# Altium PCB PCM.PcbDoc
Units mm, origin at the board's own origin, x right, y up, seen from the top; angles counter-clockwise.
Board outline 50 x 50 mm, 4 copper layers (Top Layer, GND, PWR, Bottom Layer), stack 0.778 mm thick; 169 components, 94 nets, 556 pads, 187 vias.
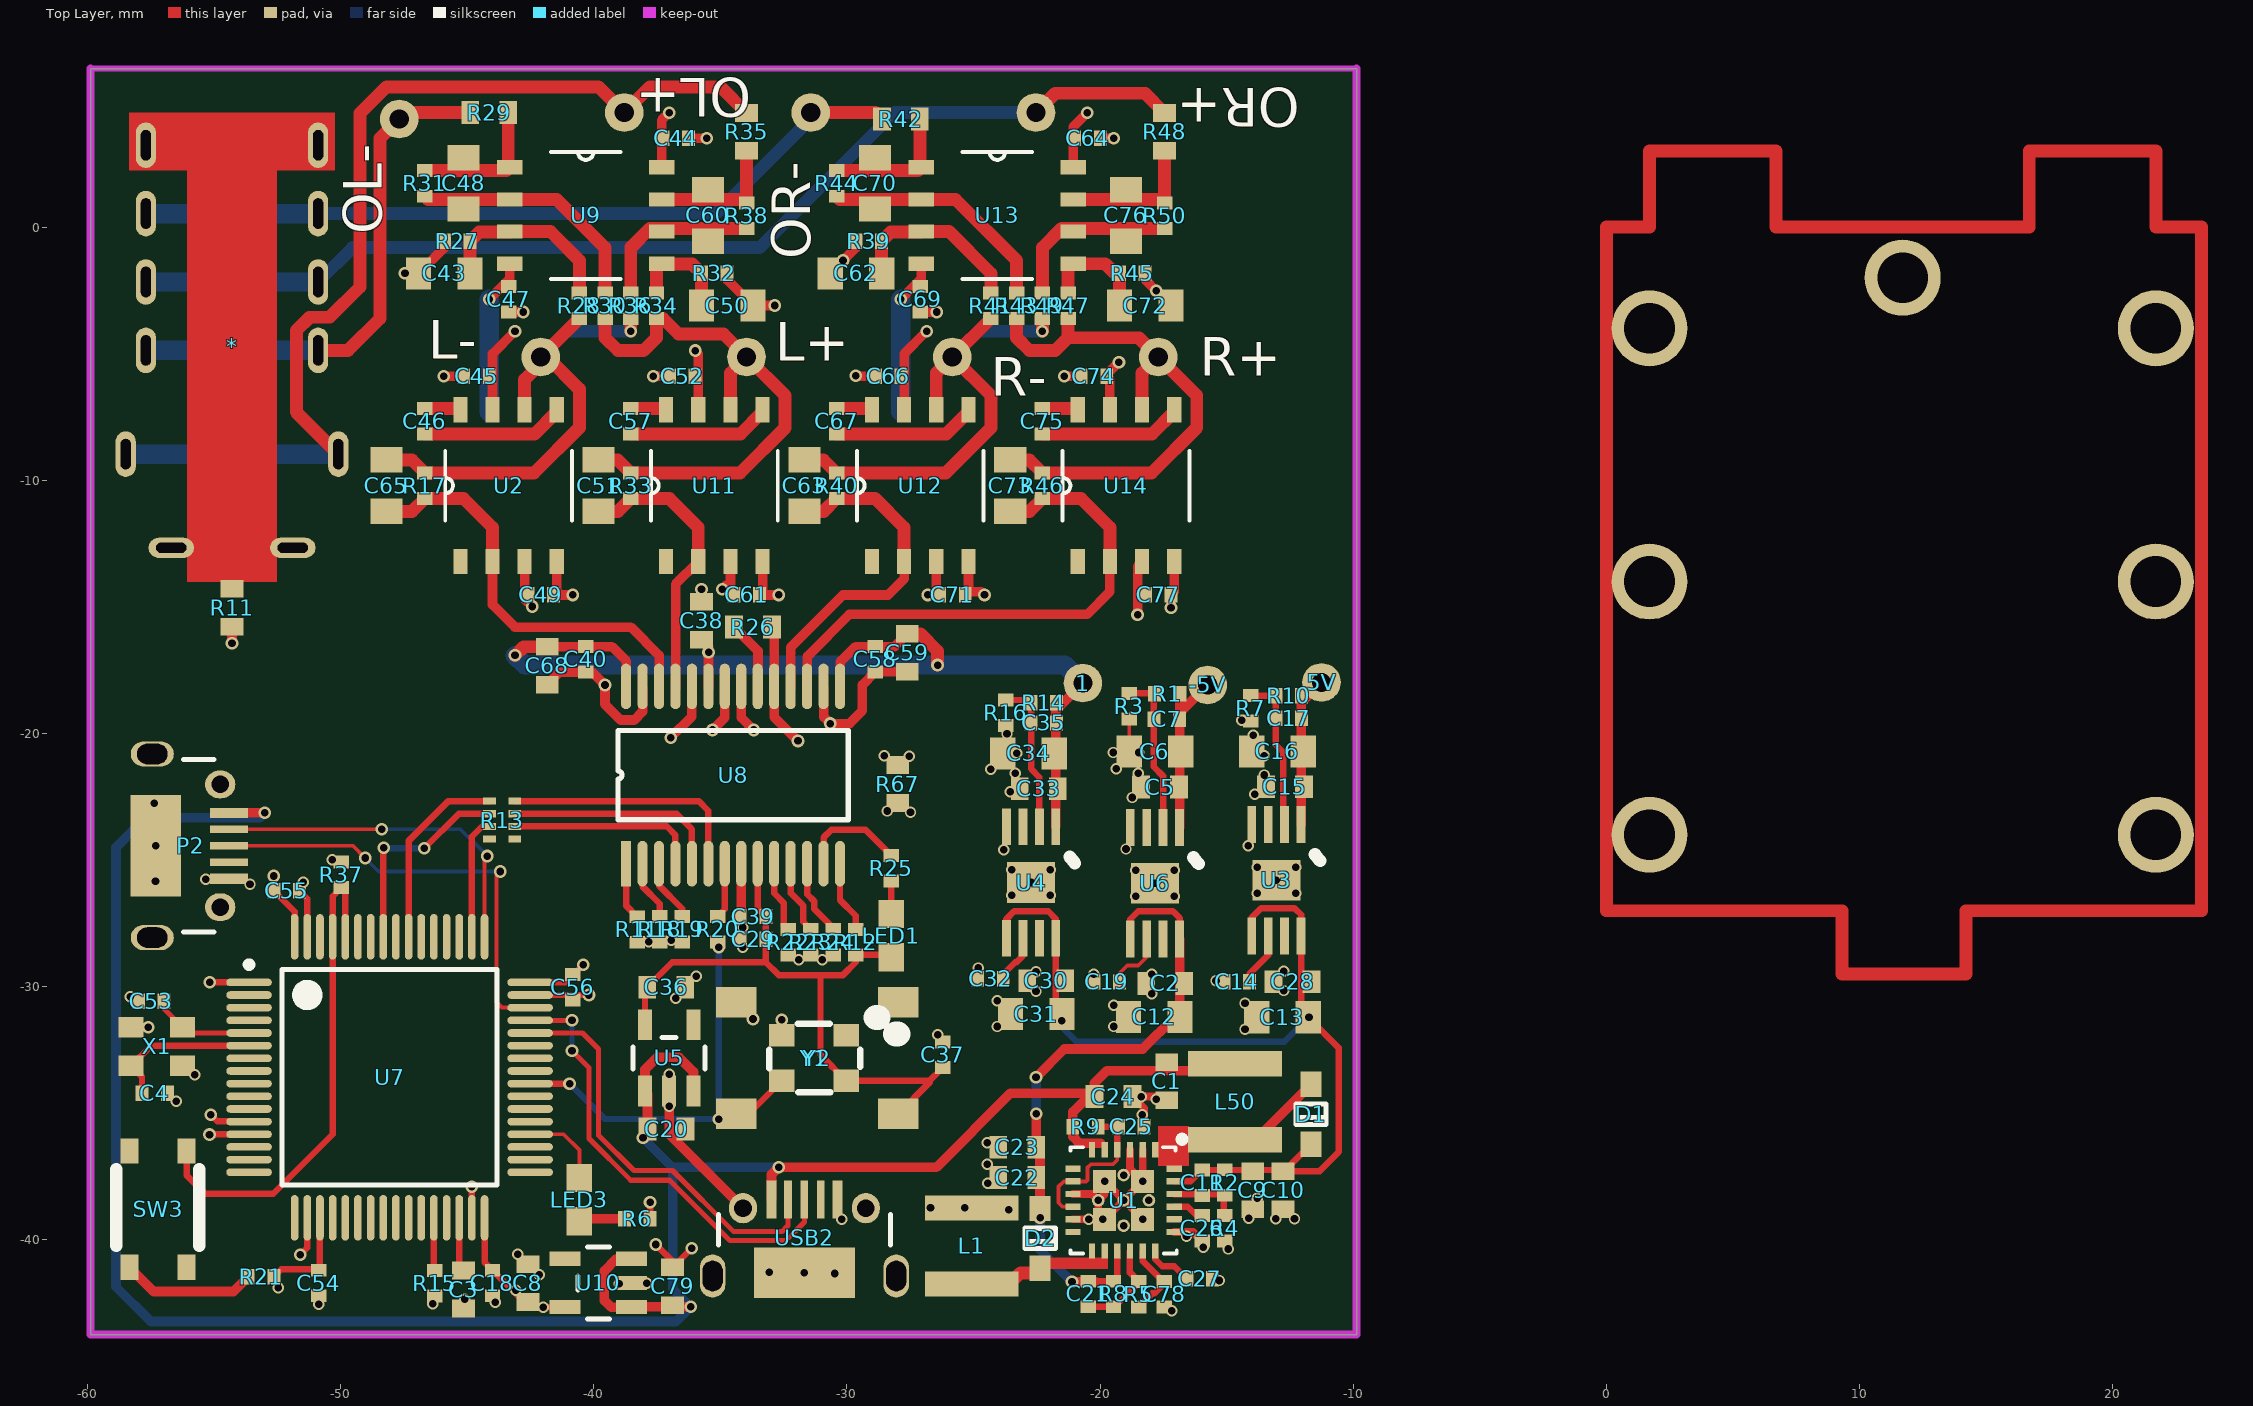
[diagram p0: Top Layer view]
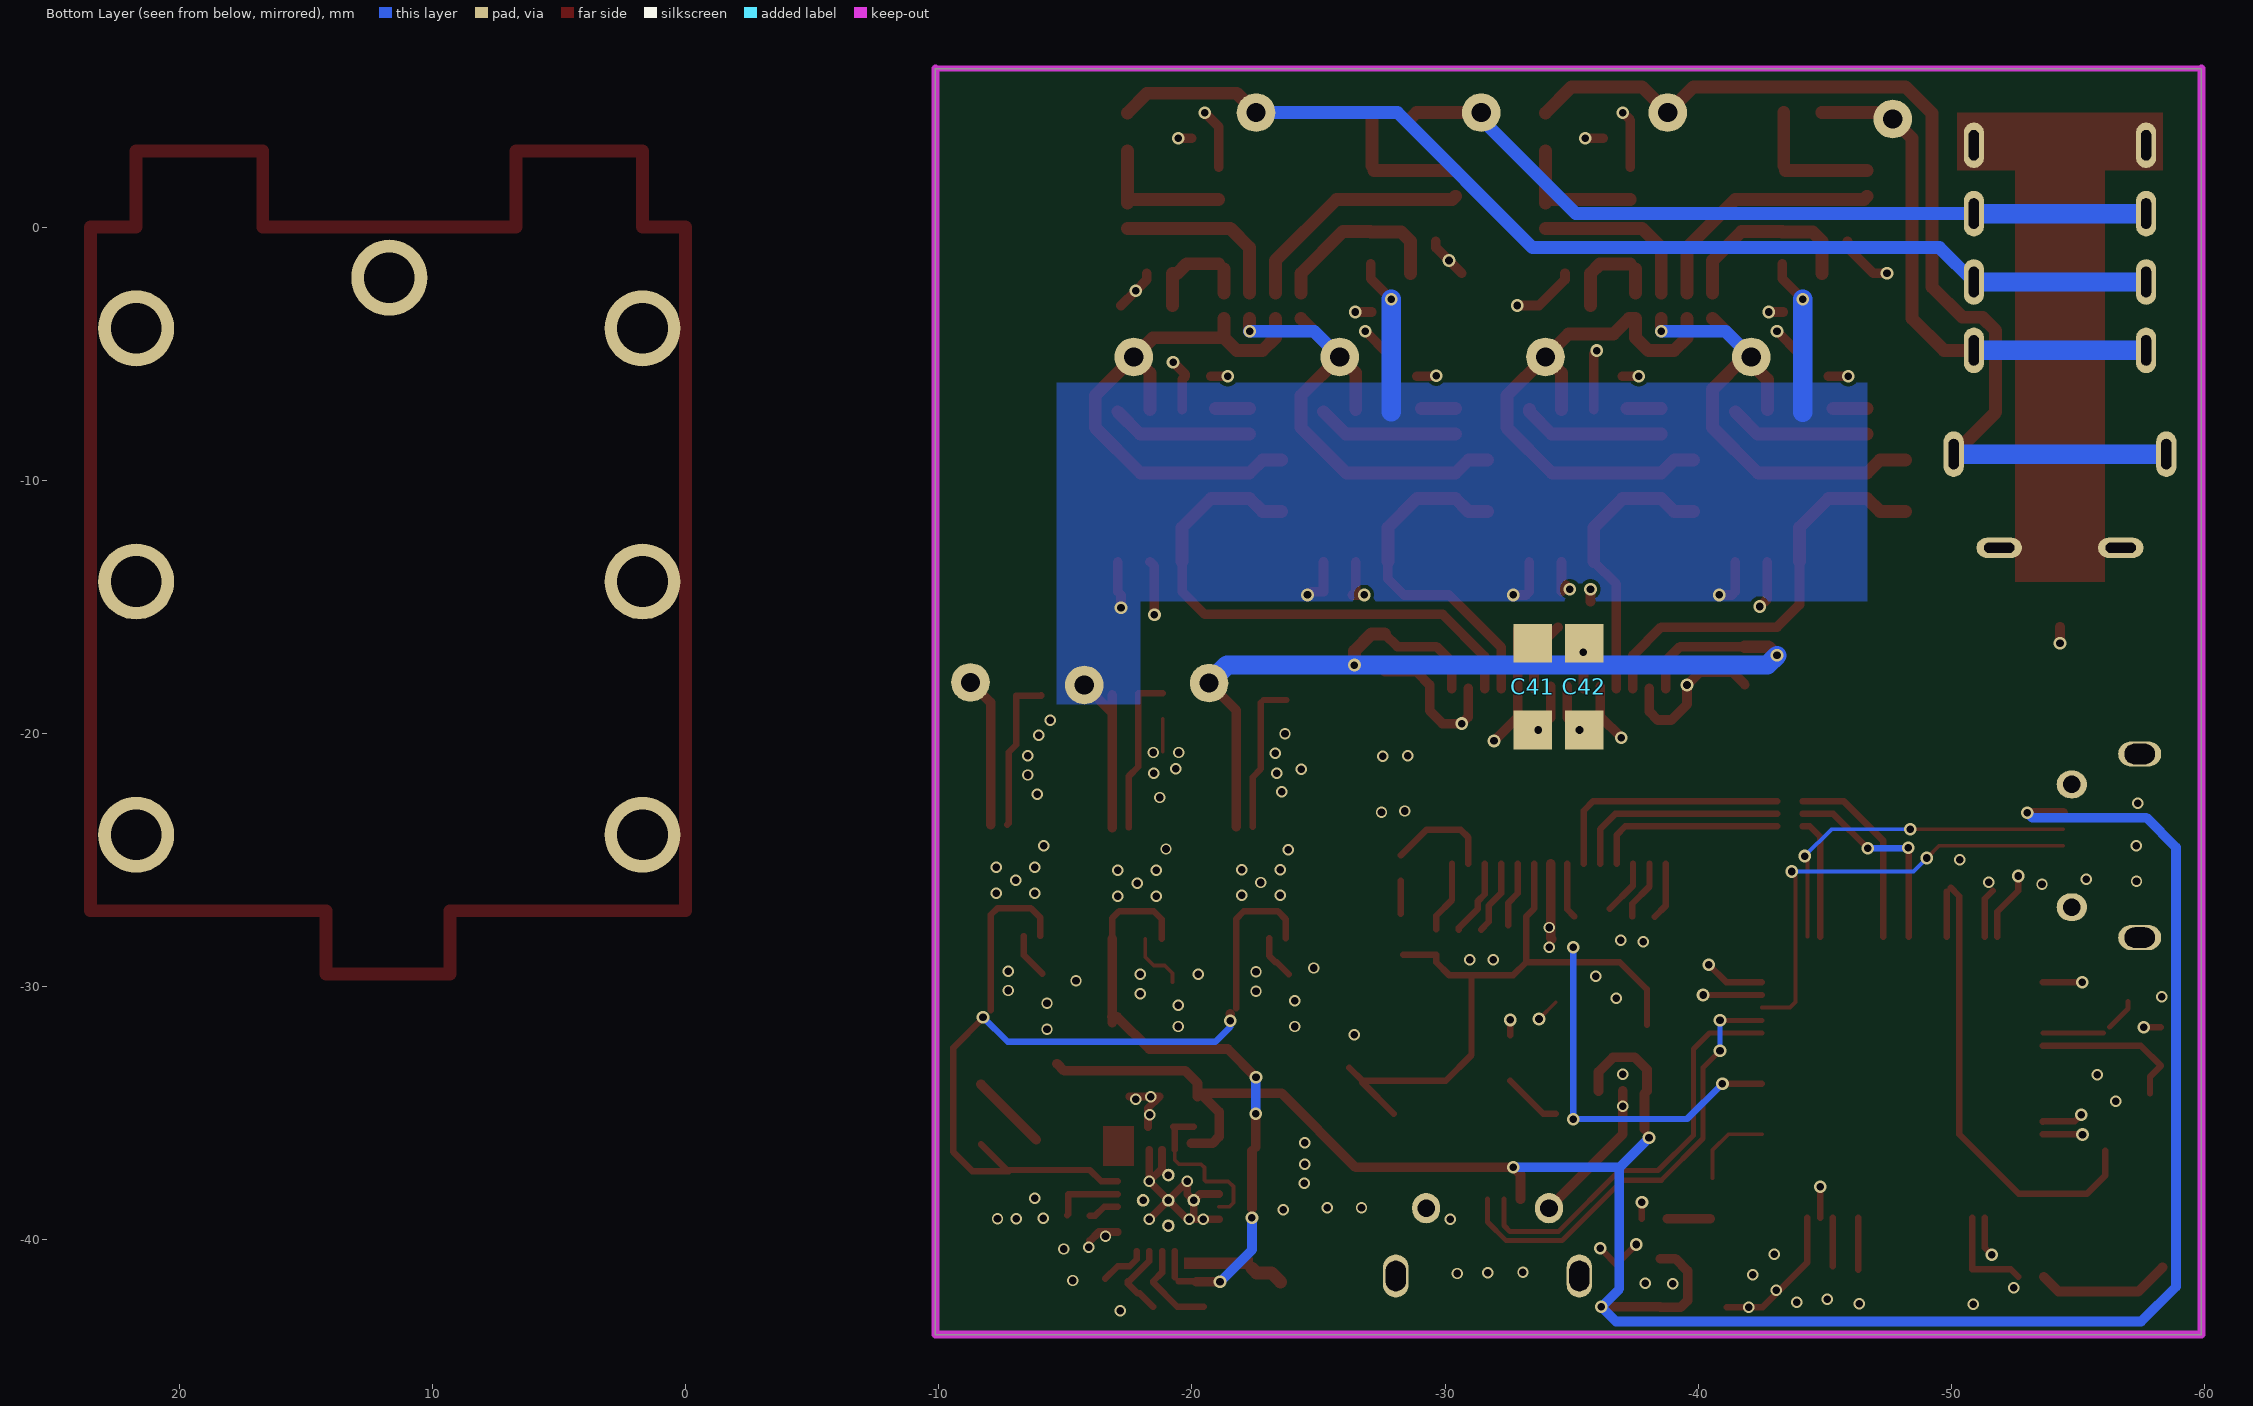
[diagram p1: Bottom Layer view, seen from below]
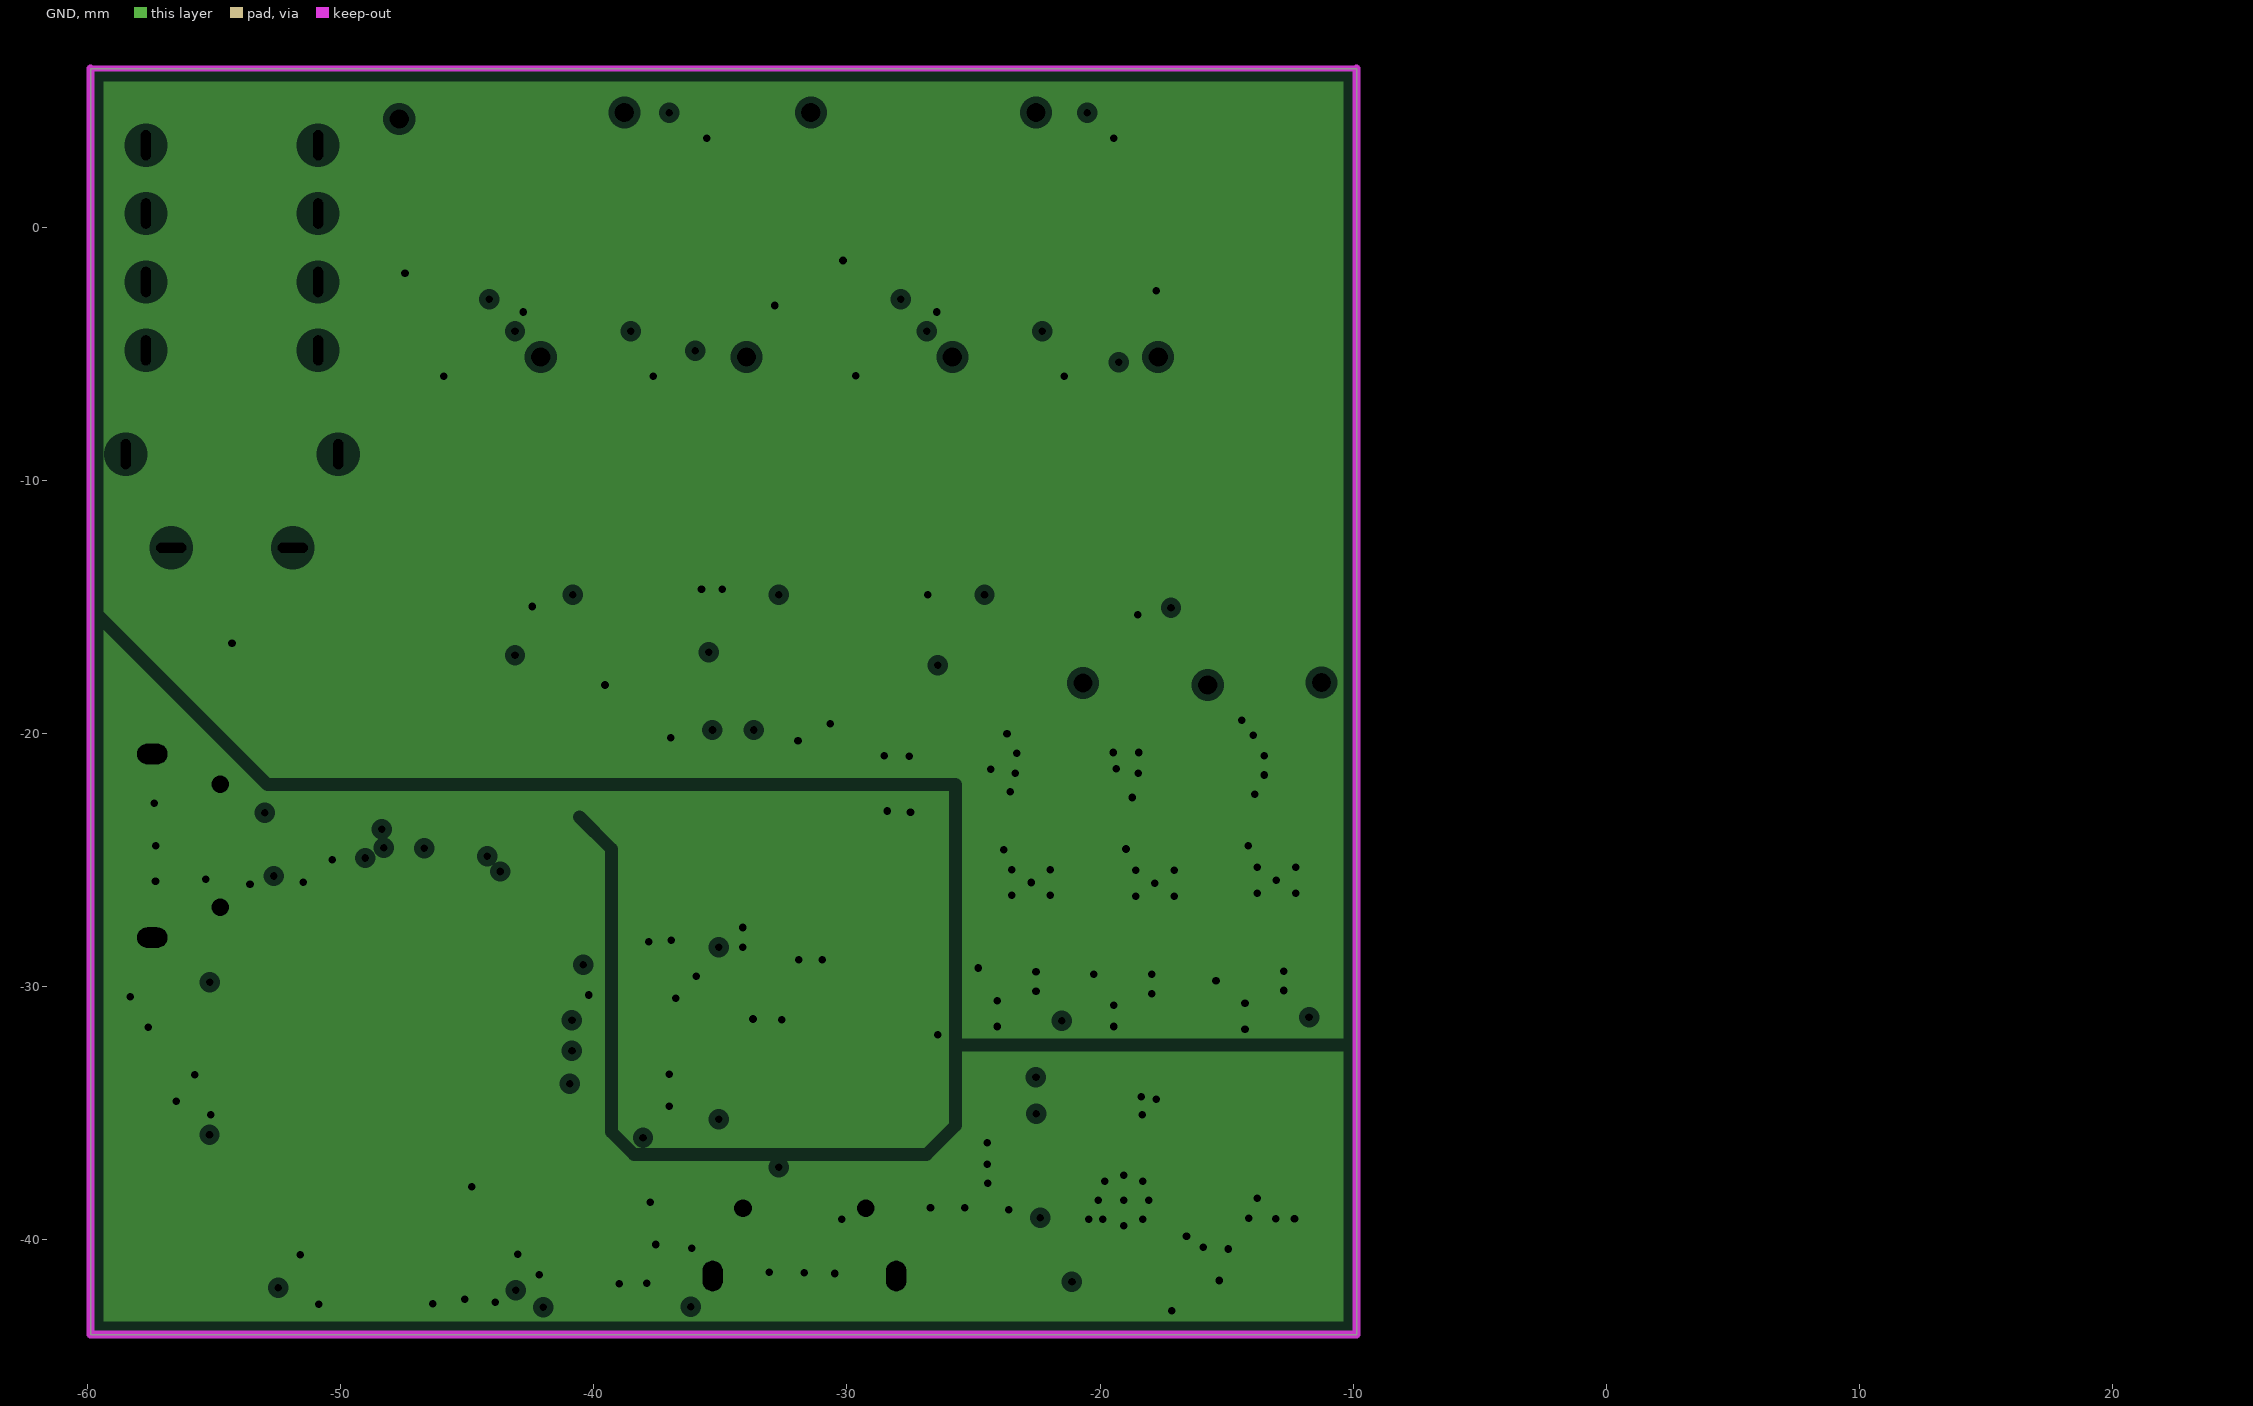
[diagram p2: GND, clearances drawn from the general rule]
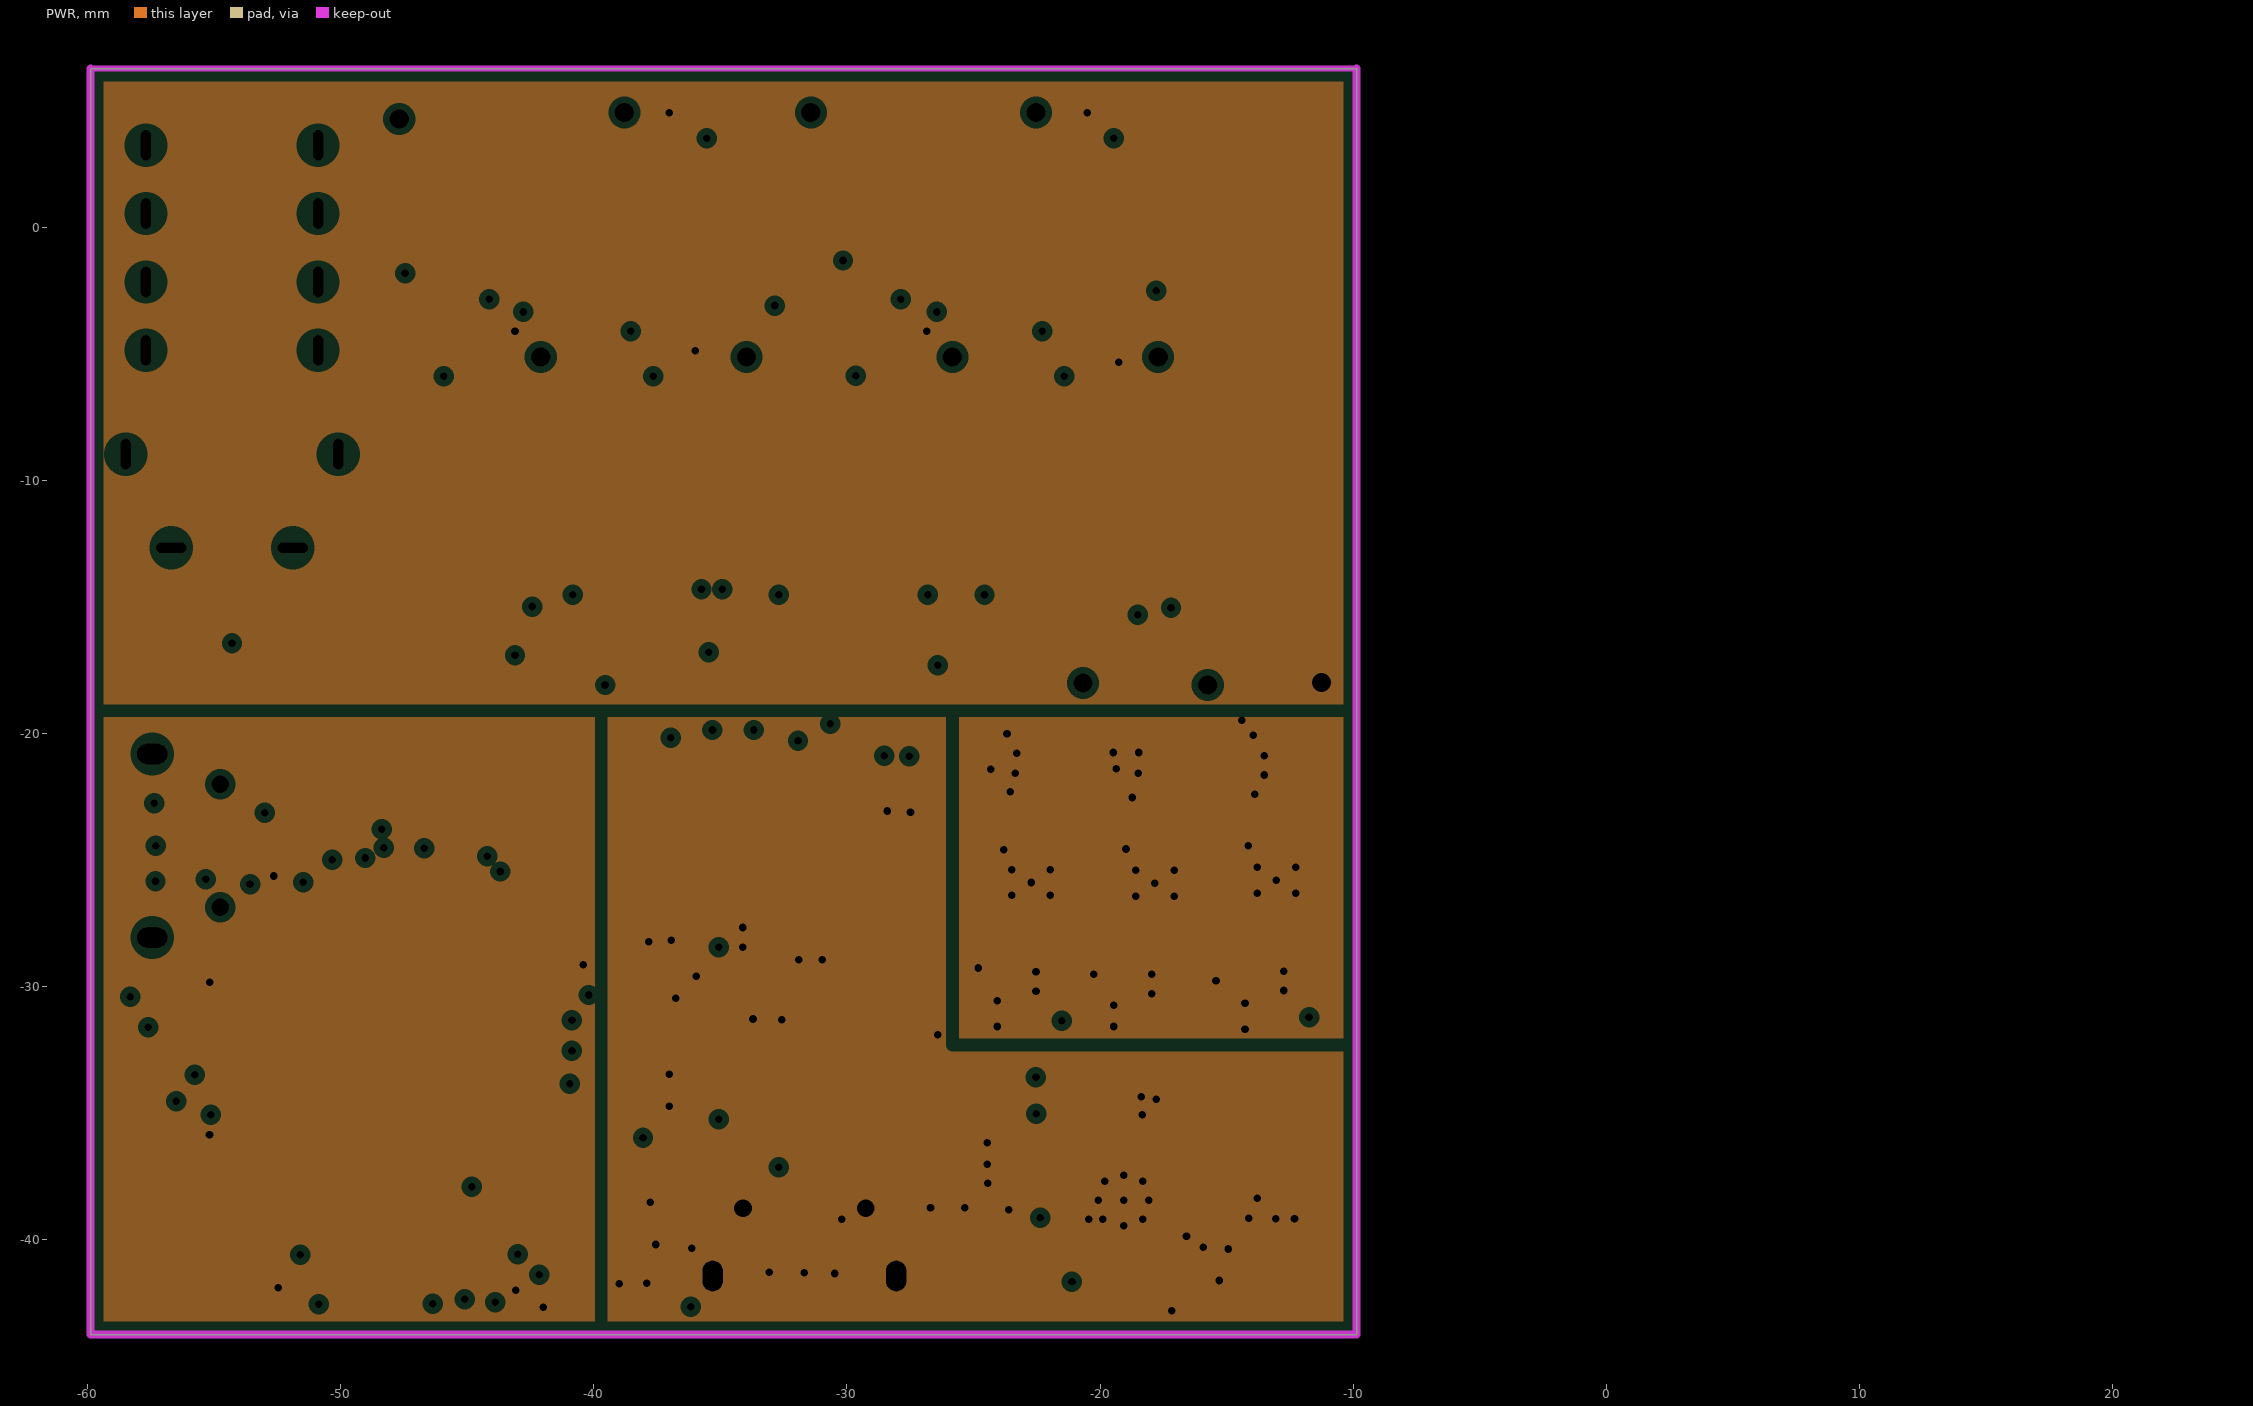
[diagram p3: PWR, clearances drawn from the general rule]

## Layer stack, top to bottom
Top Solder: solder mask 0.0102, Solder Resist, Dk 3.5
Top Layer: signal copper 0.0356
Dielectric 1: core 0.254, FR-4, Dk 4.2
GND: plane copper 0.036, net (Multiple Nets)
Dielectric 3: core 0.254, Dk 4.2
PWR: plane copper 0.036, net (Multiple Nets)
Dielectric 4: prepreg 0.127, Dk 4.2
Bottom Layer: signal copper 0.0356
Bottom Solder: solder mask 0.0102, Solder Resist, Dk 3.5

## Board outline
-59.868,-43.739 -9.868,-43.739 -9.868,6.261 -59.868,6.261

## Design rules (kind name [scope] priority, off if disabled: settings)
Clearance Clearance_1 [(InNamedPolygon('Bottom Layer-No Net')) vs Not InNet('GND')] p1: gap=0.381 ignorepadtopadclearanceinfootprint=FALSE except(0: Arc-Hole Track-Hole SMDPad-Hole THPad-Hole Via-Hole Fill-Hole Poly-Hole Region-Hole Text-Hole)
Clearance [All] p2: gap=0.152 ignorepadtopadclearanceinfootprint=FALSE except(0: Arc-Hole Track-Hole SMDPad-Hole THPad-Hole Via-Hole Fill-Hole Poly-Hole Region-Hole Text-Hole)
DiffPairsRouting [All] p1: maxlimit=0.254 minlimit=0.254 mostfreqgap=0.254 toplayer_minwidth=0.152 toplayer_maxwidth=0.381 toplayer_prefwidth=0.381 bottomlayer_minwidth=0.152 bottomlayer_maxwidth=0.381 bottomlayer_prefwidth=0.381 maxuncoupledlength=12.7
HoleSize [All] p1: absolutevalues=TRUE maxlimit=3.048 minlimit=0.025 maxpercent=80.000 minpercent=20.000
MinimumSolderMaskSliver [All] p1 off: minsoldermaskwidth=0.254
PlaneClearance [All] p1: clearance=0.254
PlaneConnect [All] p1: planeconnectstyle=Direct reliefexpansion=0.508 reliefentries=4 reliefconductorwidth=0.254 reliefairgap=0.254
PolygonConnect [All] p1: connectstyle=Direct reliefconductorwidth=0.254 reliefentries=4 polygonreliefangle="90 Angle" airgapwidth=0.254
RoomDefinition audio [InComponentClass('audio')] p1 off: confinementstyle=ConfineIn formatcopy=TRUE lockcomponents=FALSE outline -124.624,-38.601 -111.624,-38.601 -111.624,-28.851 -124.624,-28.851
RoomDefinition power [InComponentClass('power')] p2 off: confinementstyle=ConfineIn formatcopy=TRUE lockcomponents=FALSE outline -124.624,-20.351 -96.874,-20.351 -96.874,-13.101 -124.624,-13.101
RoomDefinition MCU [InComponentClass('MCU')] p3 off: confinementstyle=ConfineIn formatcopy=TRUE lockcomponents=FALSE outline -112.12,-37.845 -52.557,-37.845 -52.557,-31.749 -112.12,-31.749
RoutingVias [All] p1: holewidth=0.305 width=0.508 viastyle="Through Hole" minholewidth=0.3 minwidth=0.5 maxholewidth=0.711 maxwidth=1.27
SilkToBoardRegionClearance [All] p1 off:
SilkToSilkClearance [All] p1 off: silktosilkclearance=0.254
SilkToSolderMaskClearance [IsPad] p1 off: minsilkscreentomaskgap=0.254 clearancetoexposedcopper=TRUE
SolderMaskExpansion [All] p1: expansion=0.102
Width [All] p1: maxlimit=1.524 minlimit=0.152 preferedwidth=0.152
22 further rules are at their usual default settings.

## Classes and differential pairs
component class power: 1 5V -5V C1 C2 C5 C6 C7 C8 C9 C10 C11 C12 C13 C14 C15 C16 C17 C19 C20 C21 C22 C23 C24 C25 C26 C27 C28 C30 C31 C32 C33 C34 C35 C36 C78 C79 D1 D2 L1 L50 R1 R2 R3 R4 R5 R7 R8 R9 R10 R14 R16 R67 U1 U3 U4 U5 U6 U10
component class MCU: C3 C4 C18 C53 C54 C55 C56 LED3 P2 R6 R15 R21 R37 SW3 U7 USB2 X1
component class audio: * C29 C37 C38 C39 C40 C41 C42 C43 C44 C45 C46 C47 C48 C49 C50 C51 C52 C57 C58 C59 C60 C61 C62 C63 C64 C65 C66 C67 C68 C69 C70 C71 C72 C73 C74 C75 C76 C77 L+ L- LED1 OL+ OL- OR+ OR- R11 R12 R13 R17 R18 R19 R20 R22 R23 R24 R25 R26 R27 R28 R29 R30 R31 R32 R33 R34 R35 R36 R38 R39 R40 R41 R42 R43 R44 R45 R46 R47 R48 R49 R50 R+ R- U2 U8 U9 U11 U12 U13 U14 U? Y1 Y2

## Components (designator, comment, footprint, x,y, rotation, side; value= is the part's Value field where it differs from the comment)
1 "TestPad" TestPad -20.676,-18.009 r90 top
5V "TestPad" TestPad -11.252,-17.983 r0 top
* "4.4BAL" 4.4BAL -54.28,8.331 r270 top
-5V "TestPad" TestPad -15.748,-18.085 r90 top
C1 "10uF" 0603L -17.368,-33.739 r270 top
C2 "0.1uF" 0603L -17.424,-29.87 r180 top
C3 "Cap" 0603L -45.136,-41.961 r90 top value=4.7uF
C4 "Cap" 0402 -57.328,-34.214 r180 top value=20pF
C5 "0.1uF" 0603L -17.631,-22.114 r180 top
C6 "10uF" 0805 -17.831,-20.714 r0 top
C7 "10nF" 0402 -17.355,-19.439 r180 top
C8 "4.7uF" 0603L -42.596,-41.707 r270 top
C9 "10uF" 0603L -13.968,-38.039 r270 top
C10 "10uF" 0603L -12.768,-38.039 r270 top
C11 "10nF" 0402 -15.968,-37.739 r270 top
C12 "10uF" 0805 -17.856,-31.191 r0 top
C13 "10uF" 0805 -12.795,-31.206 r0 top
C14 "10nF" 0402 -14.595,-29.806 r180 top
C15 "0.1uF" 0603L -12.695,-22.106 r180 top
C16 "10uF" 0805 -12.995,-20.706 r0 top
C17 "10nF" 0402 -12.549,-19.406 r180 top
C18 "Cap" 0402 -43.993,-41.707 r90 top value=0.1uF
C19 "10nF" 0402 -19.731,-29.814 r180 top
C20 "4.7uF" 0603L -37.119,-35.622 r180 top
C21 "4.7nF" 0402 -20.468,-42.139 r90 top
C22 "10uF" 0603L -23.268,-37.539 r180 top
C23 "10uF" 0603L -23.268,-36.339 r180 top
C24 "10uF" 0603L -19.468,-34.339 r0 top
C25 "0.1uF" 0402 -18.768,-35.539 r0 top
C26 "10nF" 0402 -15.968,-39.539 r270 top
C27 "4.7nF" 0402 -16.068,-41.539 r0 top
C28 "0.1uF" 0603L -12.395,-29.806 r180 top
C29 "1uF" 0402 -33.706,-28.118 r0 top
C30 "0.1uF" 0603L -22.123,-29.769 r180 top
C31 "10uF" 0805 -22.521,-31.085 r0 top
C32 "10nF" 0402 -24.321,-29.685 r180 top
C33 "0.1uF" 0603L -22.421,-22.185 r180 top
C34 "10uF" 0805 -22.821,-20.785 r0 top
C35 "10nF" 0402 -22.221,-19.585 r180 top
C36 "4.7uF" 0603L -37.135,-30.023 r180 top
C37 "1uF" 0402 -26.213,-32.69 r270 top
C38 "1uF" 0603L -35.738,-15.545 r90 top
C39 "1uF" 0402 -33.706,-27.229 r0 top
C40 "1uF" 0402 -40.31,-17.069 r270 top
C41 "1uF" 1206 -33.452,-19.863 r90 bottom
C42 "1uF" 1206 -35.484,-19.863 r90 bottom
C43 "2.2nF" 0805 -45.898,-1.829 r180 top
C44 "0.1uF" 0402 -36.754,3.505 r0 top
C45 "0.1uF" 0402 -44.628,-5.893 r0 top
C46 "22pF" 0402 -46.66,-7.671 r90 top
C47 "0.1uF" 0402 -43.358,-2.845 r270 top
C48 "2.2nF" 0805 -45.136,1.727 r90 top
C49 "0.1uF" 0402 -42.088,-14.529 r0 top
C50 "2.2nF" 0805 -34.722,-3.099 r0 top
C51 "2.2nF" 0805 -39.802,-10.211 r90 top
C52 "0.1uF" 0402 -36.5,-5.893 r0 top
C53 "Cap" 0402 -57.48,-30.582 r0 top value=20pF
C54 "Cap" 0402 -50.851,-41.707 r90 top value=0.1uF
C55 "Cap" 0402 -52.121,-26.213 r180 top value=0.1uF
C56 "Cap" 0402 -40.818,-30.023 r90 top value=0.1uF
C57 "22pF" 0402 -38.532,-7.671 r90 top
C58 "1uF" 0402 -28.88,-17.069 r270 top
C59 "1uF" 0603L -27.61,-16.815 r270 top
C60 "2.2nF" 0805 -35.484,0.457 r90 top
C61 "0.1uF" 0402 -33.96,-14.529 r0 top
C62 "2.2nF" 0805 -29.642,-1.829 r180 top
C63 "2.2nF" 0805 -31.674,-10.211 r90 top
C64 "0.1uF" 0402 -20.498,3.505 r0 top
C65 "2.2nF" 0805 -48.184,-10.211 r90 top
C66 "0.1uF" 0402 -28.372,-5.893 r0 top
C67 "22pF" 0402 -30.404,-7.671 r90 top
C68 "1uF" 0603L -41.834,-17.323 r270 top
C69 "0.1uF" 0402 -27.102,-2.845 r270 top
C70 "2.2nF" 0805 -28.88,1.727 r90 top
C71 "0.1uF" 0402 -25.832,-14.529 r0 top
C72 "2.2nF" 0805 -18.212,-3.099 r0 top
C73 "2.2nF" 0805 -23.546,-10.211 r90 top
C74 "0.1uF" 0402 -20.244,-5.893 r0 top
C75 "22pF" 0402 -22.276,-7.671 r90 top
C76 "2.2nF" 0805 -18.974,0.457 r90 top
C77 "0.1uF" 0402 -17.704,-14.529 r0 top
C78 "220nF" 0402 -17.468,-42.139 r270 top
C79 "4.7uF" 0603L -36.881,-41.834 r270 top
D1 "" LC-SOD-323 -11.668,-35.039 r90 top
D2 "" LC-SOD-323 -22.368,-39.939 r90 top
L1 "2.2uH" L4015 -25.068,-41.739 r90 top
L50 "2.2uH" L4015 -14.668,-33.039 r270 top
L+ "TestPad" TestPad -33.96,-5.131 r0 top
L- "TestPad" TestPad -42.088,-5.131 r0 top
LED1 "LED0" 0603 -28.245,-27.991 r90 top
LED3 "LED0" 0603 -40.564,-38.405 r270 top
OL+ "TestPad" TestPad -38.786,4.521 r180 top
OL- "TestPad" TestPad -47.676,4.267 r180 top
OR+ "TestPad" TestPad -22.53,4.521 r90 top
OR- "TestPad" TestPad -31.42,4.521 r90 top
P2 "SWD_MicroUSB" MICRO-YZX -60.249,-24.435 r270 top
R1 "17k" 0402 -17.355,-18.439 r0 top
R2 "17k" 0402 -15.068,-37.739 r90 top
R3 "10k" 0402 -18.847,-18.923 r90 top
R4 "17k" 0402 -15.068,-39.539 r90 top
R5 "17k" 0402 -18.468,-42.139 r270 top
R6 "10k" 0402 -38.278,-39.167 r0 top value=0Ohm
R7 "10k" 0402 -14.049,-19.006 r90 top
R8 "17k" 0402 -19.468,-42.139 r90 top
R9 "100R" 0402 -20.568,-35.539 r180 top
R10 "17k" 0402 -12.549,-18.506 r0 top
R11 "10k" 0402 -38.278,-27.737 r270 top value=0Ohm
R11 "22R/0R/NC" 0603L -54.28,-15.037 r270 top value=0Ohm
R12 "10k" 0402 -29.642,-28.245 r90 top value=0Ohm
R13 "Res*4" 0402X4 -43.612,-23.419 r180 top value=200Ohm
R14 "17k" 0402 -22.221,-18.785 r0 top
R15 "10k" 0402 -46.279,-41.707 r270 top value=0Ohm
R16 "10k" 0402 -23.721,-19.185 r90 top
R17 "820R" 0402 -46.66,-10.211 r270 top value=0Ohm
R18 "10k" 0402 -37.389,-27.737 r90 top value=0Ohm
R19 "10k" 0402 -36.5,-27.737 r90 top value=0Ohm
R20 "100R" 0402 -35.103,-27.737 r90 top value=0Ohm
R21 "1k" 0402 -53.137,-41.453 r0 top value=0Ohm
R22 "10k" 0402 -32.309,-28.245 r270 top value=0Ohm
R23 "10k" 0402 -31.42,-28.245 r270 top value=0Ohm
R24 "10k" 0402 -30.531,-28.245 r270 top value=0Ohm
R25 "10k" 0402 -28.245,-25.324 r90 top value=0Ohm
R26 "10k" 0603L -33.706,-15.799 r180 top value=0Ohm
R27 "270R" 0402 -45.39,-0.559 r0 top value=0Ohm
R28 "560R" 0402 -40.564,-3.099 r270 top value=0Ohm
R29 "0R" 0603L -44.12,4.521 r0 top value=0Ohm
R30 "560R" 0402 -39.548,-3.099 r270 top value=0Ohm
R31 "270R" 0402 -46.66,1.727 r270 top value=0Ohm
R32 "270R" 0402 -35.23,-1.829 r180 top value=0Ohm
R33 "820R" 0402 -38.532,-10.211 r270 top value=0Ohm
R34 "560R" 0402 -37.516,-3.099 r270 top value=0Ohm
R35 "0R" 0603L -33.96,3.759 r270 top value=0Ohm
R36 "560R" 0402 -38.532,-3.099 r270 top value=0Ohm
R37 "Res2" 0402 -49.962,-25.578 r270 top value=10k
R38 "270R" 0402 -33.96,0.457 r270 top value=0Ohm
R39 "270R" 0402 -29.134,-0.559 r0 top value=0Ohm
R40 "820R" 0402 -30.404,-10.211 r270 top value=0Ohm
R41 "560R" 0402 -24.308,-3.099 r270 top value=0Ohm
R42 "0R" 0603L -27.864,4.267 r0 top value=0Ohm
R43 "560R" 0402 -23.292,-3.099 r270 top value=0Ohm
R44 "270R" 0402 -30.404,1.727 r270 top value=0Ohm
R45 "270R" 0402 -18.72,-1.829 r180 top value=0Ohm
R46 "820R" 0402 -22.276,-10.211 r270 top value=0Ohm
R47 "560R" 0402 -21.26,-3.099 r270 top value=0Ohm
R48 "0R" 0603L -17.45,3.759 r270 top value=0Ohm
R49 "560R" 0402 -22.276,-3.099 r270 top value=0Ohm
R50 "270R" 0402 -17.45,0.457 r270 top value=0Ohm
R67 "FB" 0603L -27.991,-21.996 r270 top
R+ "TestPad" TestPad -17.704,-5.131 r0 top
R- "TestPad" TestPad -25.832,-5.131 r0 top
SW3 "SW-PB" SW3x4 -57.201,-38.786 r270 top
U1 "TPS65130" TPS65130 -19.068,-38.439 r270 top
U2 "NE5534" SO8 -43.358,-10.211 r90 top
U3 "tps7a3001" MSOP8/VSSOP8+PAD -13.033,-25.798 r270 top
U4 "tps7a3001" MSOP8/VSSOP8+PAD -22.721,-25.885 r270 top
U5 "LP5907" SOT23-5 -37.019,-32.822 r0 top
U6 "tps7a3001" MSOP8/VSSOP8+PAD -17.831,-25.914 r270 top
U7 "STM32F401RCT6" STM-LQFP64_N -48.057,-33.579 r0 top
U8 "PCM1794" PCM1794 -34.493,-21.641 r90 top
U9 "OP-2" SO8 -40.31,0.457 r0 top
U10 "LP5907" SOT23-5 -39.802,-41.707 r90 top
U11 "NE5534" SO8 -35.23,-10.211 r90 top
U12 "NE5534" SO8 -27.102,-10.211 r90 top
U13 "OP-2" SO8 -24.054,0.457 r0 top
U14 "NE5534" SO8 -18.974,-10.211 r90 top
USB2 "USB Micro Type B" MICRO-YZX -31.674,-44.247 r0 top
X1 "24.000 KHz 3.2x2.5mm 8-10pf" OSCILLATOR-2.5x2.0 -57.252,-32.36 r0 top
Y1 "OSC3225" TXC_7Q -31.293,-32.817 r180 top
Y2 "OSC7050" OSC7050 -31.166,-32.817 r180 top

## Footprints (in the part's own frame and the unit in brackets; to place one, negate y for a bottom-side part, rotate by r counter-clockwise, add the part's x,y. Pads: shape width x height; smd on the part's side, far side on the other; paste and mask are expansions set on the pad)
4.4BAL [mm]
  oval 1.8x0.8 hole 0.4 slot 1.2 at 0 deg: 1(5.1,3.4) 1(5.1,-3.4) 2(7.8,-3.4) 2(7.8,3.4) 3(10.5,-3.4) 3(10.5,3.4) 4(13.2,-3.4) 4(13.2,3.4) 5(17.3,-4.2) 6(17.3,4.2)
  oval 0.8x1.8 hole 0.4 slot 1.2 at 90 deg: 7(21,-2.4) 7(21,2.4)
  body extent 3.5,-5 22,5, height 6.4
0402 [mil] "0402-RES"
  rect 20x24 smd: 1(-19.69,0) 2(20,0)
0402X4 [mm]
  rect 0.5x0.28 smd: 1(-0.5,0.75) 2(-0.5,0.25) 3(-0.5,-0.25) 4(-0.5,-0.75) 5(0.5,-0.75) 6(0.5,-0.25) 7(0.5,0.25) 8(0.5,0.75)
0603 [mil] "0603-RES"
  rect 44x40 smd: 1(-33.46,0) 2(34,0)
  body extent -31,-16 31,16, height 31
0603L [mm]
  rect 0.7x0.9 smd: 1(-0.75,0) 2(0.75,0)
  body extent -0.8,-0.4 0.8,0.4, height 0.8
0805 [mm]
  rect 1x1.27 smd: 1(-1.016,0) 2(1.016,0)
  body extent -1.27,-0.76 1.27,0.76, height 0.8
1206 [mil]
  rect 60x60 smd: 1(0,0) 2(135,0)
L4015 [mm]
  rect 1x3.7 smd: 1(0,0) 2(3,0)
LC-SOD-323 [mm]
  rect 1x0.83 smd: 1(1.18,0) 2(-1.18,0)
  silkscreen extent -0.4,-0.6 0.4,0.6, body extent -1.35,-0.62 1.35,0.63, height 1.1
MICRO-YZX [mm]
  rect 0.4x1.5 smd: 1(-1.3,5.85) 5(1.3,5.85)
  rect 0.3x1.5 smd: 2(-0.65,5.85) 3(0,5.85) 4(0.65,5.85)
  oval 1x1.7 hole 0.8 slot 1.2 at 90 deg: 5(-3.625,2.82) 5(3.625,2.82)
  oval 1.1x1.2 hole 0.7: 5(-2.425,5.5) 5(2.425,5.5)
  rect 4x2 smd: 5(0,2.95)
  silkscreen extent -3.4,4.05 3.4,5.25, body extent -4.02,0.33 3.98,5.93, height 2.6
MSOP8/VSSOP8+PAD [mm]
  rect 1.6x1.9 smd: 0(0,0)
  rect 1.45x0.35 smd: 1(-2.2,0.975) 2(-2.2,0.325) 3(-2.2,-0.325) 4(-2.2,-0.975) 5(2.2,-0.975) 6(2.2,-0.325) 7(2.2,0.325) 8(2.2,0.975)
  silkscreen extent -1.02,1.52 -0.77,1.72
OSC7050 [mm]
  rect 1.6x1.2 smd: 1(-3.2,-2.2) 2(3.2,-2.2) 3(3.2,2.2) 4(-3.2,2.2)
  silkscreen extent -3.17,-0.95 -3.1,-0.95, body extent -3.75,-2.5 3.75,2.5, height 1.5
OSCILLATOR-2.5x2.0 [mm] "OSCILLATOR-3.2X2.5"
  rect 1x0.8 smd: 1(-1.016,-0.762) 2(1.016,-0.762) 3(1.016,0.762) 4(-1.016,0.762)
  body extent -1.27,-1.02 1.27,1.02, height 0.9
PCM1794 [mm]
  rect 1.8x0.4 smd: 1(-3.5,4.225)
  oval 1.8x0.4 smd: 2(-3.5,3.575) 3(-3.5,2.925) 4(-3.5,2.275) 5(-3.5,1.625) 6(-3.5,0.975) 7(-3.5,0.325) 8(-3.5,-0.325) 9(-3.5,-0.975) 10(-3.5,-1.625) 11(-3.5,-2.275) 12(-3.5,-2.925) 13(-3.5,-3.575) 14(-3.5,-4.225) 15(3.5,-4.225) 16(3.5,-3.575) 17(3.5,-2.925) 18(3.5,-2.275) 19(3.5,-1.625) 20(3.5,-0.975) 21(3.5,-0.325) 22(3.5,0.325) 23(3.5,0.975) 24(3.5,1.625) 25(3.5,2.275) 26(3.5,2.925) 27(3.5,3.575) 28(3.5,4.225)
  silkscreen extent -1.77,-4.55 1.77,4.55, body extent -2.75,-5.5 2.75,5.25, height 1
SO8 [mm]
  rect 1x0.559 smd: 1(-3,1.905) 2(-3,0.635) 3(-3,-0.635) 4(-3,-1.905) 5(3,-1.905) 6(3,-0.635) 7(3,0.635) 8(3,1.905)
  silkscreen extent -1.37,-2.5 1.37,2.5, body extent -3,-2.45 3,2.45, height 1.63
SOT23-5 [mil] "SOT23-5"
  rect 22x48 smd: 1(-37.4,-51.19) 2(0,-51.19) 3(38,-51.19) 4(38,52) 5(-37.4,52)
  silkscreen extent -56,-17 56,32, body extent -57,-55 57,55, height 47
STM-LQFP64_N [mm] "Thin QFP, 64-Leads, Body 10x10mm, Pitch 0.5mm, IPC Medium Density"
  oval 1.8x0.3 smd: 1(-5.55,3.75) 2(-5.55,3.25) 3(-5.55,2.75) 4(-5.55,2.25) 5(-5.55,1.75) 6(-5.55,1.25) 7(-5.55,0.75) 8(-5.55,0.25) 9(-5.55,-0.25) 10(-5.55,-0.75) 11(-5.55,-1.25) 12(-5.55,-1.75) 13(-5.55,-2.25) 14(-5.55,-2.75) 15(-5.55,-3.25) 16(-5.55,-3.75) 33(5.55,-3.75) 34(5.55,-3.25) 35(5.55,-2.75) 36(5.55,-2.25) 37(5.55,-1.75) 38(5.55,-1.25) 39(5.55,-0.75) 40(5.55,-0.25) 41(5.55,0.25) 42(5.55,0.75) 43(5.55,1.25) 44(5.55,1.75) 45(5.55,2.25) 46(5.55,2.75) 47(5.55,3.25) 48(5.55,3.75)
  oval 0.3x1.8 smd: 17(-3.75,-5.55) 18(-3.25,-5.55) 19(-2.75,-5.55) 20(-2.25,-5.55) 21(-1.75,-5.55) 22(-1.25,-5.55) 23(-0.75,-5.55) 24(-0.25,-5.55) 25(0.25,-5.55) 26(0.75,-5.55) 27(1.25,-5.55) 28(1.75,-5.55) 29(2.25,-5.55) 30(2.75,-5.55) 31(3.25,-5.55) 32(3.75,-5.55) 49(3.75,5.55) 50(3.25,5.55) 51(2.75,5.55) 52(2.25,5.55) 53(1.75,5.55) 54(1.25,5.55) 55(0.75,5.55) 56(0.25,5.55) 57(-0.25,5.55) 58(-0.75,5.55) 59(-1.25,5.55) 60(-1.75,5.55) 61(-2.25,5.55) 62(-2.75,5.55) 63(-3.25,5.55) 64(-3.75,5.55)
  silkscreen extent -5.67,-4.25 4.25,4.57, body extent -5,-5 5,5, height 1.6
SW3x4 [mm]
  rect 1x0.7 smd: 1(-2.3,1.125) 2(2.3,-1.125) 3(2.3,1.125) 4(-2.3,-1.125)
  silkscreen extent -1.58,-1.65 1.45,1.63, body extent -2,-1.5 2,1.5, height 2.6
TestPad [mil]
  round 60 hole 30: 1(0,0)
TPS65130 [mm]
  round 0.5 hole 0.3: 0(-1,0) 0(0,1) 0(0,0) 0(0,-1) 0(1,0)
  rect 0.9x0.9 smd: 0(-0.75,0.75) 0(-0.75,-0.75) 0(0.75,0.75) 0(0.75,-0.75)
  rect 0.6x0.25 smd: 1(-2,1.25) 2(-2,0.75) 3(-2,0.25) 4(-2,-0.25) 5(-2,-0.75) 6(-2,-1.25) 13(2,-1.25) 14(2,-0.75) 15(2,-0.25) 16(2,0.25) 17(2,0.75) 18(2,1.25)
  rect 0.25x0.6 smd: 7(-1.25,-2) 8(-0.75,-2) 9(-0.25,-2) 10(0.25,-2) 11(0.75,-2) 12(1.25,-2) 19(1.25,2) 20(0.75,2) 21(0.25,2) 22(-0.25,2) 23(-0.75,2) 24(-1.25,2)
  silkscreen extent -2.42,-2.1 2.1,2.3, body extent -2,-2 2,2, height 1
TXC_7Q [mm]
  rect 1x0.9 smd: 1(-1.275,-0.9) 2(1.275,-0.9) 3(1.275,0.9) 4(-1.275,0.9)
  silkscreen extent -2.52,-1.6 1.78,1.35

## Part data
C1 C2 C5 C6 C7 C8 C9 C10 C11 C12 C13 C14 C15 C16 C17 C19 C20 C21 C22 C23 C24 C25 C26 C27 C28 C29 C30 C31 C32 C33 C34 C35 C36 C37 C38 C39 C40 C41 C42 C43 C44 C45 C46 C47 C48 C49 C50 C51 C52 C57 C58 C59 C60 C61 C62 C63 C64 C65 C66 C67 C68 C69 C70 C71 C72 C73 C74 C75 C76 C77 C78 C79: library part Cap, "Capacitor"
  C1 C2 C5 C6 C7 C8 C9 C10 C11 C12 C13 C14 C15 C16 C17 C19 C20 C21 C22 C23 C24 C25 C26 C27 C28 C30 C31 C32 C33 C34 C35 C36 C78 C79: LatestRevisionDate=17-Jul-2002, LatestRevisionNote="Re-released for DXP Platform.", PackageDescription="Radial Cap, Thru-Hole; 2 Leads; 0.3 in Pin Spacing", PackageReference=RAD-0.3, Published=8-Jun-2000, Publisher="Altium Limited"
C3 C4 C18 C53 C54 C55 C56: "Capacitor", LatestRevisionDate=17-Jul-2002, LatestRevisionNote="Re-released for DXP Platform.", PackageDescription="Radial Cap, Thru-Hole; 2 Leads; 0.3 in Pin Spacing", PackageReference=RAD-0.3, Published=8-Jun-2000, Publisher="Altium Limited"
D1 D2: library part "Diode 1N4148", "High Conductance Fast Diode", Code_JEDEC=DO-204-AH, ComponentLink1Description="Manufacturer Link", ComponentLink1URL=http://www.fairchildsemi.com/, ComponentLink2Description=Datasheet, ComponentLink2URL=http://www.fairchildsemi.com/ds/1N%2F1N4148.pdf, DatasheetVersion=1997, LatestRevisionDate=17-Jul-2002, LatestRevisionNote="Re-released for DXP Platform.", PackageDescription="Diode, Axial; Body 3.8 x 1.9 mm (LxDia. max), Lead Dia. 0.53 mm (max)", PackageReference=DO-35, Published=8-Jun-2000, Publisher="Altium Limited"
L1 L50: library part Inductor, "Inductor", Code_IEC=1005, Code_JEITA=0402, LatestRevisionDate=29-May-2009, LatestRevisionNote="IPC-7351 Footprint Added.", PackageDescription="Chip Inductor", PackageReference=0402-A, Published=8-Jun-2000, Publisher="Altium Limited"
LED1 LED3: "Typical INFRARED GaAs LED", LatestRevisionDate=08-Jul-2005, LatestRevisionNote="Mech Layer 1 removed.", PackageDescription="LED; 2 Leads", PackageReference=LED-0, Published=8-Jun-2000, Publisher="Altium Limited"
P2: "Connector SMD USB Micro Type B middle mount", Manufacturer 1="Molex Inc", Package / Case=SMD, Supplier Part Number 1=WM17142CT-ND, SCDType=undef, Supplier 1=Digi-Key
R1 R2 R3 R4 R5 R6 R7 R8 R9 R10 R11 R11 R12 R14 R15 R16 R17 R18 R19 R20 R21 R22 R23 R24 R25 R26 R27 R28 R29 R30 R31 R32 R33 R34 R35 R36 R38 R39 R40 R41 R42 R43 R44 R45 R46 R47 R48 R49 R50 R67: library part Res2, "Resistor", LatestRevisionDate=17-Jul-2002, LatestRevisionNote="Re-released for DXP Platform.", PackageDescription="Axial Device, Thru-Hole; 2 Leads; 0.4 in Pin Spacing", PackageReference=AXIAL-0.4, Published=8-Jun-2000, Publisher="Altium Limited"
R13 R37: "Resistor", LatestRevisionDate=17-Jul-2002, LatestRevisionNote="Re-released for DXP Platform.", PackageDescription="Axial Device, Thru-Hole; 2 Leads; 0.4 in Pin Spacing", PackageReference=AXIAL-0.4, Published=8-Jun-2000, Publisher="Altium Limited"
SW3: "Switch", LatestRevisionDate=17-Jul-2002, LatestRevisionNote="Re-released for DXP Platform.", PackageDescription="Switch; 2 Leads", PackageReference=SPST-2, Published=24-Mar-1999, Publisher="Altium Limited"
U7: "ARM Cortex-M4 32-bit MCU+FPU, 105 DMIPS, 256 kB Flash, 64 kB Internal RAM, 48 I/Os, 64-pin LQFP, -40 to 85 degC, Tray", I/Os (High Current)=48, Manufacturer=STMicroelectronics, Operating Frequency(F) (Processor speed) (MHz)=84, Supplier Part Number 1=497-14047-ND, Supply Voltage(Vcc) max (V)=3.6, Supply Voltage(Vcc) min (V)=1.8, ComponentLink1Description="Manufacturer URL", ComponentLink1URL=http://www.st.com/web/en/home.html, ComponentLink2Description=Datasheet, ComponentLink2URL=http://www.st.com/st-web-ui/static/active/en/resource/technical/document/data_brief/DM00071938.pdf, ComponentLink3Description="Package Specification", ComponentLink3URL=http://www.st.com/st-web-ui/static/active/en/resource/technical/document/datasheet/DM00037051.pdf, Core="ARM Cortex-M4", DatasheetVersion="Rev. 1", FLASH Size (Prog) (kB)=256, Internal RAM Size (kB)=64, Mounting Technology="Surface Mount", PackageDescription="64-Pin Low Profile Quad Flat Package, 10 x 10 mm Body, 0.5 mm Pitch", PackageReference=LQFP64, PackageVersion="Rev. 4, 06/2013", Packing=Tray, PartNumber=STM32F401RCT6, Supplier 1=Digi-Key, Supplier 2=Newark, Supplier 3=Mouser, Supplier Part Number 2=19X6221, Supplier Part Number 3=511-STM32F401RCT6
USB2: library part USB_Micro_TypeB, "Connector SMD USB Micro Type B middle mount", Manufacturer 1="Molex Inc", Manufacturer Part Number 1=47491-0001, Package / Case=SMD, Supplier Part Number 1=WM17142CT-ND, SCDType=undef, Supplier 1=Digi-Key
X1: library part OSCILLATOR-3.2X2.5, "Crystal Oscillator in 3.2x2.5 SMD"
Y1 Y2: library part OSC_40M

## Free pads (board coordinates)
  round 3 hole 2: 6(1.7,-24) 6(1.7,-14) 6(1.7,-4) 6(11.7,-2) 6(21.7,-24) 6(21.7,-14) 6(21.7,-4)

## Via types
v1: diameter 0.45, hole 0.3, Top Layer to Bottom Layer, 111 vias
v2: diameter 0.5, hole 0.3, Top Layer to Bottom Layer, 76 vias

## Nets (pads, with @x,y where several pads share a name; then routed paths per layer and width w, separated by ;. In a path a pad name is that pad's centre, name@x,y a point inside that pad or via, vN(x,y) a via of type N, cw(c..) or ccw(c..) an arc to the next point about the centre after c; other vN are vias at no path point)
3.3A: C29.2 C36.2 C37.2 C39.2 LED1.1 R12.1 U5.5 U8.9 Y1.4 Y2.4 | length 26.5
  Top Layer w0.254: U5.5 C36.2@-37.969,-30.107 ; C36.2 -36.894,-29.032 -33.198,-29.032 ; U8.9 -33.518,-26.908 C39.2 C29.2 -33.198,-29.032 ; LED1.1@-28.341,-28.745 R12.1 -29.642,-29.032 -30.15,-29.54 -31.039,-29.54 ; Y2.4 -26.732,-33.783 -26.732,-33.717 ; C37.2 -26.732,-33.717 ; -33.198,-29.032 -32.69,-29.54 -31.039,-29.54 ; -31.039,-29.54 -31.039,-32.696 Y1.4 -26.732,-33.717
3.3D: C8.2 C18.2 C54.2 C55.2 C56.2 R21.2 U7.1 U7.13 U7.19 U7.32 U7.48 U7.64 U10.5 | length 17.9
  Top Layer w0.254: v2(-55.169,-35.839) -55.158,-35.829 U7.13 ; v2(-55.16,-29.829) U7.1 ; R21.2 -52.331,-41.155 -50.807,-41.155 U7.19 ; v2(-52.629,-25.629) C55.2 -51.807,-27.035 U7.64 ; U7.32 -44.307,-40.885 C18.2 -42.535,-42.657 U10.5 ; U7.48 -41.106,-29.829 v2(-40.411,-29.134)
  other v1: -41.986,-42.657 -43.078,-41.986 -52.451,-41.885
5A: 1.1 C33.1 C34.2 C35.1 C38.1 C40.1 C41.2 C42.2 C58.1 C59.1 C68.1 R14.2 U4.1 U8.15 U8.23 U8.28 | length 42.7
  Top Layer w0.381: C68.1 -39.282,-16.573 -38.71,-17.145 U8.28@-38.71,-18.222 ; U8.23@-35.46,-18.222 v2(-35.46,-16.789) C38.1@-35.46,-16.573 ; U8.15@-30.26,-18.222 -30.26,-17.179 -29.65,-16.569 C58.1 -28.114,-16.569 C59.1 ; U4.1 -21.746,-19.079 1.1
  Top Layer w0.508: v2(-43.104,-16.916) -42.76,-16.573 C68.1 ; C59.1 -27.09,-16.065 -26.416,-16.739 v2(-26.416,-17.297)
  Bottom Layer w0.762: v2(-43.104,-16.916) -42.723,-17.297 v2(-26.416,-17.297) -21.387,-17.297 1.1
5V: C1.1 C20.2 C24.1 C79.2 L50.1 P2.1 R9.2 U1.5 U1.6 U5.1 U5.3 U10.1 U10.3 USB2.1 | length 96.5
  Top Layer w0.381: P2.1 v2(-52.989,-23.135) ; U10.1 -39.309,-42.657 -39.573,-42.393 -39.573,-41.224 -39.091,-40.742 U10.3 ; U10.1@-38.491,-42.647 v2(-36.17,-42.647) ; C20.2 -37.869,-34.222 U5.1 -37.969,-33.27 -37.49,-32.791 -36.627,-32.791 -36.054,-33.365 U5.3 ; USB2.1 -32.974,-37.419 v2(-32.69,-37.135) -26.467,-37.135 -23.546,-34.214 C24.1@-20.343,-34.214 ; -19.964,-36.186 -20.811,-36.186 -21.076,-35.922 R9.2 -21.076,-34.947 C24.1@-20.343,-34.214 ; L50.1 -14.954,-33.325 -19.736,-33.325 -20.218,-33.807 C24.1 C24.1@-20.343,-34.214
  Bottom Layer w0.381: v2(-52.989,-23.135) -53.181,-23.326 -57.693,-23.326 -58.861,-24.495 -58.861,-41.85 -57.486,-43.225 -36.748,-43.225 v2(-36.17,-42.647) -36.881,-41.935 -36.881,-37.135 ; v2(-38.049,-35.966) -36.881,-37.135 ; v2(-32.69,-37.135) -36.881,-37.135
7V: 5V.1 C15.1 C16.2 C17.1 C44.1 C45.2 C52.2 C64.1 C66.2 C74.2 R10.2 U2.7 U3.1 U9.8 U11.7 U12.7 U13.8 U14.7 | length 22.7
  Top Layer w0.381: U2.7 -43.993,-5.004 v2(-43.104,-4.115) ; U9.8 -37.31,4.219 v2(-37.008,4.521) ; v2(-35.992,-4.877) -35.865,-5.004 U11.7 ; U12.7 -27.737,-5.004 v2(-26.848,-4.115) ; U13.8 -21.054,3.965 v2(-20.498,4.521) ; U14.7 -19.609,-6.02 C74.2 -19.736,-5.817 v2(-19.253,-5.334) ; U3.1 R10.2@-12.058,-18.777 ; C17.1 -12.049,-18.78 5V.1
9V: C9.1 C10.1 C11.1 C13.2 C28.1 C30.1 C31.2 D1.2 R2.2 U1.23 U3.5 U3.8 U4.5 U4.8 | length 38.2
  Top Layer w0.254: U4.5 -23.696,-27.328 -23.393,-27.026 -22.047,-27.026 -21.746,-27.327 U4.8 C31.2@-21.746,-30.844 ; U1.23 -16.418,-37.689 C11.1 -12.688,-37.239 D1.2 ; U3.5 -14.008,-27.267 -13.64,-26.899 -12.319,-26.899 -12.058,-27.16 U3.8 C13.2@-12.058,-30.927 ; C10.1 -11.33,-37.289 -10.566,-36.525 -10.566,-32.418 C13.2 v2(-11.746,-31.206)
  Top Layer w0.381: C31.2@-21.514,-31.076 C31.2
  Bottom Layer w0.254: v2(-21.514,-31.344) -21.514,-31.59 -20.926,-32.178 -12.718,-32.178 v2(-11.746,-31.206)
-7V: -5V.1 C5.1 C6.2 C7.1 C47.1 C49.2 C61.2 C69.1 C71.2 C77.2 R1.2 U2.4 U6.1 U9.4 U11.4 U12.4 U13.4 U14.4 | length 26.9
  Top Layer w0.381: v2(-44.12,-2.845) -43.31,-2.035 U9.4 ; U2.4 -41.453,-14.402 -41.326,-14.529 v2(-40.818,-14.529) ; U11.4 -33.325,-14.402 -33.198,-14.529 v2(-32.69,-14.529) ; v2(-27.864,-2.845) -27.054,-2.035 U13.4 ; U12.4 -25.197,-14.402 -24.689,-14.402 v2(-24.562,-14.529) ; v2(-17.196,-15.037) C77.2 -17.069,-14.402 U14.4 ; U6.1 R1.2@-16.856,-18.481 ; C7.1 -16.855,-19.191 -5V.1
  Bottom Layer w0.762: -44.12,-7.315 v2(-44.12,-2.845) ; -27.864,-7.29 v2(-27.864,-2.845)
-9V: C2.1 C12.2 C21.2 C22.1 C23.1 D2.1 R8.2 U1.15 U6.5 U6.8 | length 24.8
  Top Layer w0.254: C21.2 R8.2 ; R8.2@-19.318,-41.481 U1.15 ; U6.5 -18.806,-27.34 -18.491,-27.026 -17.12,-27.026 -16.856,-27.289 U6.8
  Top Layer w0.381: v2(-22.53,-33.579) -21.412,-32.461 -18.313,-32.461 -17.043,-31.191 C12.2@-16.856,-31.191 ; C23.1 v2(-22.518,-35.015) ; D2.1 C23.1@-22.368,-36.489 ; v2(-21.107,-41.656) C21.2@-20.167,-41.656 ; C12.2@-16.856,-31.414 C12.2@-16.856,-31.191 ; U6.8 C12.2@-16.856,-31.191 ; C12.2 C12.2@-16.856,-31.191
  Bottom Layer w0.381: v2(-22.53,-33.579) -22.518,-33.591 v2(-22.518,-35.015) ; v2(-22.368,-39.126) -22.368,-40.396 v2(-21.107,-41.656)
AGND: C2.2 C5.2 C6.1 C12.1 C13.1 C14.2 C15.2 C16.1 C19.2 C28.2 C30.2 C31.1 C32.2 C33.2 C34.1 C38.2 C40.2 C43.2 C44.2 C45.1 C47.2 C49.1 C50.2 C52.1 C58.2 C59.2 C61.1 C62.2 C64.2 C66.1 C68.2 C69.2 C71.1 C72.2 C74.1 C77.1 R3.1 R7.1 R11.2@-54.28,-15.787 R16.1 R26.1 R27.1 R32.1 R39.1 R45.1 R67.1 U2.3 U3.0 U3.4 U4.0 U4.4 U6.0 U6.4 U8.16 U8.19 U8.24 U8.27 U11.3 U12.3 U14.3 | length 42.8
  Top Layer w0.152: C6.1 R3.1
  Top Layer w0.381: v2(-54.28,-16.434) R11.2@-54.28,-15.787 ; v2(-47.447,-1.829) C43.2 -45.89,-0.805 R27.1 ; v2(-45.923,-5.893) C45.1 ; C47.2 v2(-42.774,-3.353) ; U2.3 -42.723,-14.681 v2(-42.418,-14.986) ; C68.2 -41.338,-17.577 C40.2 -40.056,-17.577 v2(-39.548,-18.085) -39.548,-18.852 -38.934,-19.465 -38.388,-19.465 -38.06,-19.137 U8.27@-38.06,-18.222 ; v2(-37.643,-5.893) C52.1 ; v2(-36.957,-20.168) -36.118,-19.329 U8.24 ; C44.2 v2(-35.535,3.505) ; C38.2 v2(-35.738,-14.3) ; v2(-34.925,-14.3) -34.773,-14.148 -34.595,-14.148 ; R32.1 -34.73,-2.075 C50.2 v2(-32.842,-3.099) ; C61.1@-34.595,-14.394 -34.595,-14.148 ; U11.3 -34.595,-14.148 ; U8.19 -32.868,-19.354 v2(-31.928,-20.295) ; U8.19@-32.86,-18.222 R26.1@-32.86,-15.895 ; U8.16@-30.91,-18.222 -30.91,-19.357 v2(-30.658,-19.609) -29.896,-19.609 -29.388,-19.101 -29.388,-18.085 C58.2 -28.868,-17.565 C59.2 ; C62.2 v2(-30.15,-1.321) -29.634,-0.805 R39.1 ; v2(-29.642,-5.867) -29.616,-5.893 C66.1 ; C69.2 v2(-26.441,-3.353) ; v2(-26.797,-14.529) C71.1 ; C71.1@-26.467,-14.394 U12.3 ; v2(-21.412,-5.893) C74.1 ; C64.2 v2(-19.456,3.505) ; v2(-18.517,-15.316) -18.517,-13.389 U14.3 ; R45.1 -18.22,-2.075 v2(-17.78,-2.515) C72.2
  other v1: -14.275,-31.674 -24.054,-31.572 -19.456,-31.572 -19.456,-30.734 -14.275,-30.658 -24.054,-30.556 -17.958,-30.277 -22.53,-30.175 -12.751,-30.15 -15.418,-29.769 -20.244,-29.515 -17.958,-29.515 -22.53,-29.413 -12.751,-29.388 -24.816,-29.261 -18.593,-26.422 -17.069,-26.422 -23.483,-26.393 -21.959,-26.393 -13.795,-26.306 -12.271,-26.306 -17.831,-25.914 -22.721,-25.885 -13.033,-25.798 -18.593,-25.406 -17.069,-25.406 -23.483,-25.377 -21.959,-25.377 -13.795,-25.29 -12.271,-25.29 -23.8,-24.587 -18.974,-24.562 -14.148,-24.435 -18.72,-22.53 -13.894,-22.403 -23.546,-22.301 -13.513,-21.641 -23.343,-21.565 -18.491,-21.565 -24.308,-21.412 -19.355,-21.387 -27.534,-20.904 -28.524,-20.879 -13.513,-20.879 -23.292,-20.777 -19.482,-20.752 -18.466,-20.752 -13.945,-20.066 -23.673,-20.015 -14.402,-19.482
GND: C1.2 C3.1 C4.1 C8.1 C9.2 C10.2 C18.1 C20.1 C22.2 C23.2 C24.2 C25.2 C26.2 C27.2 C29.1 C36.1 C37.1 C39.1 C53.1 C54.1 C55.1 C56.1 C78.2 C79.1 L1.2 P2.5 R4.1 R6.2 R11.2@-38.278,-28.245 R15.2 R18.1 R19.1 R22.2 R23.2 R24.2 R37.1 R67.2 U1.0 U1.2 U1.3 U1.9 U1.11 U1.19 U5.2 U7.12 U7.18 U7.31 U7.47 U7.63 U8.8 U10.2 USB2.5 X1.2 X1.4 Y1.2 Y2.2 | length 37.2
  Top Layer w0.152: Y2.2 v2(-33.706,-31.277)
  Top Layer w0.254: X1.4 v2(-57.582,-31.598) ; v2(-55.118,-35.052) -54.86,-35.31 -53.607,-35.31 U7.12 ; C55.1 -51.307,-26.527 U7.63 ; v2(-51.587,-40.589) -51.307,-40.309 U7.18 ; U7.31 -44.807,-37.898 v2(-44.806,-37.897) ; U7.47 v2(-40.184,-30.329) ; R6.2 v2(-37.77,-38.506) ; v2(-37.541,-40.183) -36.881,-40.843 C79.1 -36.867,-41.084 v2(-36.119,-40.335) ; Y1.2 v2(-32.568,-31.313)
  Top Layer w0.305: U1.11 v1(-20.443,-39.189) v1(-19.888,-39.189) -19.818,-39.189 U1.0@-19.068,-38.439 ; U1.9 -20.318,-38.189 U1.0@-20.068,-38.439 ; U1.0@-20.068,-38.939 U1.0@-20.068,-38.439 ; U1.3 -18.818,-37.189 v1(-18.318,-37.689) ; v1(-18.318,-39.189) U1.0@-19.068,-38.439 ; U1.2 v1(-18.318,-37.689) ; C25.2 -18.26,-34.797 C24.2 C1.2@-17.518,-34.339 ; U1.19 -16.326,-39.689 C26.2 ; U1.0@-20.068,-38.439 -19.818,-38.189 v1(-19.818,-37.689) U1.0@-19.068,-38.439 ; U1.0@-19.068,-38.439 v1(-18.318,-37.689)
  Top Layer w0.381: U5.2 -37.019,-35.827 USB2.5@-34.099,-38.747 ; C29.1 -34.168,-28.08 U8.8
  other v1: -17.17,-42.799 -50.851,-42.545 -46.355,-42.52 -43.891,-42.469 -45.085,-42.342 -38.989,-41.732 -37.897,-41.707 -15.291,-41.605 -42.139,-41.377 -30.48,-41.326 -31.674,-41.297 -33.071,-41.275 -43.002,-40.564 -14.935,-40.361 -15.926,-40.284 -16.586,-39.853 -30.201,-39.192 -13.056,-39.167 -12.319,-39.167 -14.122,-39.141 -23.597,-38.811 -26.695,-38.735 -25.349,-38.735 -13.792,-38.354 -24.435,-37.77 -24.46,-37.008 -24.46,-36.17 -18.339,-35.052 -37.008,-34.722 -56.49,-34.519 -17.78,-34.442 -18.364,-34.341 -55.753,-33.477 -37.008,-33.452 -26.416,-31.902 -36.754,-30.455 -58.293,-30.404 -35.941,-29.591 -31.902,-28.931 -30.963,-28.931 -34.112,-28.448 -37.821,-28.219 -36.932,-28.169 -34.112,-27.661 -53.569,-25.959 -51.46,-25.883 -57.302,-25.832 -55.321,-25.756 -50.317,-24.994 -57.299,-24.435 -27.483,-23.114 -28.397,-23.063 -57.353,-22.758
KEY: R37.2 SW3.1 U7.60 U7.61 | length 19.7
  Top Layer w0.254: SW3.1 -56.076,-37.447 -55.347,-38.176 -52.654,-38.176 -50.307,-35.829 U7.61 -50.307,-26.431 R37.2 ; U7.60 R37.2@-49.807,-26.241
Net*_1: *.1 *.7 R11.1@-54.28,-14.287
NetC3_2: C3.2 U7.30 | length 1.9
  Top Layer w0.254: C3.2@-45.307,-41.04 U7.30
NetC4_2: C4.2 U7.6 X1.1 | length 6.3
  Top Layer w0.254: C4.2 -57.836,-33.553 X1.1 -57.475,-32.329 U7.6
NetC7_2: C7.2 R1.1 R3.2 U6.2 | length 6.4
  Top Layer w0.254: R3.2 -17.879,-18.415 -17.879,-21.313 -17.51,-21.682 -17.51,-23.709 U6.2
NetC11_2: C11.2 R2.1 R4.2 U1.22 | length 2.8
  Top Layer w0.254: U1.22 -15.118,-38.189 -15.118,-38.981 R4.2
NetC14_1: C14.1 U3.6 | length 1.8
  Top Layer w0.254: -14.095,-29.487 -13.358,-28.75 U3.6
NetC17_2: C17.2 R7.2 R10.1 U3.2 | length 6.2
  Top Layer w0.254: R7.2 -14.041,-18.506 R10.1 -13.056,-18.513 -13.056,-20.447 -12.758,-20.744 -12.758,-23.547 U3.2
NetC19_1: C19.1 U6.6 | length 2.4
  Top Layer w0.152: C19.1 -19.231,-29.467 -18.923,-29.159 -18.491,-29.159 -18.156,-28.824 U6.6
NetC21_1: C21.1 R5.1 R8.1 U1.16 | length 3.8
  Top Layer w0.254: C21.1 R8.1 -19.423,-42.639 -18.468,-41.683 R5.1 -18.818,-41.289 U1.16
NetC25_1: C25.1 R9.1 U1.4 U1.8 U1.10 | length 6.4
  Top Layer w0.152: U1.10 -21.484,-38.689 -21.641,-38.532 -21.641,-37.897 -21.433,-37.689 U1.8 -20.544,-37.689 -20.498,-37.643 -20.498,-37.145 -20.362,-37.01 -19.484,-37.01 -19.318,-36.844 U1.4
  Top Layer w0.254: R9.1 C25.1 -19.318,-35.589 U1.4
NetC26_1: C26.1 U1.21 | length 1.2
  Top Layer w0.254: U1.21 -16.531,-38.689 -16.181,-39.039 C26.1
NetC27_1: C27.1 U1.18 | length 1.9
  Top Layer w0.254: U1.18 -17.818,-40.76 -17.537,-41.041 -17.066,-41.041 C27.1
NetC32_1: C32.1 U4.6 | length 1.8
  Top Layer w0.254: C32.1@-23.821,-29.51 -23.35,-29.039 -23.299,-29.039 -23.046,-28.786 U4.6
NetC35_2: C35.2 R14.1 R16.2 U4.2 | length 5.9
  Top Layer w0.254: R16.2 R14.1@-22.829,-18.677 ; R14.1 -22.721,-21.399 -22.396,-21.724 U4.2
NetC41_1: C41.1 U8.21 | length 1.9
  Top Layer w0.381: U8.21 -34.168,-19.375 v2(-33.68,-19.863)
NetC42_1: C42.1 U8.22 | length 1.9
  Top Layer w0.381: v2(-35.306,-19.863) -34.818,-19.375 U8.22
NetC43_1: C43.1 R27.2 R28.1 U9.3 | length 7.5
  Top Layer w0.508: C43.1 R27.2 -44.518,-0.195 -43.31,-0.195 U9.3 -41.707,-0.178 -40.564,-1.321 R28.1
NetC46_1: C46.1 U2.5 | length 5.6
  Top Layer w0.508: C46.1 -46.652,-8.179 -42.337,-8.179 U2.5@-41.453,-7.295
NetC46_2: C46.2 U2.8 | length 1.3
  Top Layer w0.508: C46.2 U2.8@-45.311,-7.163
NetC48_1: C48.1 R30.1 R31.2 U9.2 | length 9.7
  Top Layer w0.508: R31.2 -46.533,1.092 U9.2 -41.453,1.092 -39.548,-0.813 R30.1
NetC48_2: C48.2 R29.2 R31.1 U9.1 | length 5.3
  Top Layer w0.508: R31.1 U9.1@-43.445,2.227 ; U9.1@-43.37,2.422 R29.2
NetC50_1: C50.1 R32.2 R34.1 U9.5 | length 4
  Top Layer w0.508: R34.1 U9.5@-37.516,-1.654 ; U9.5 -37.31,-1.465 -36.101,-1.465 R32.2 C50.1
NetC51_1: C51.1 R33.2 U8.25 U11.2 | length 11.4
  Top Layer w0.381: U8.25@-36.76,-18.222 -36.76,-14.106 U11.2
  Top Layer w0.508: C51.1 -39.04,-11.227 R33.2 -37.008,-10.719 -35.865,-11.862 U11.2
NetC51_2: C51.2 L+.1 R30.2 R33.1 R34.2 U11.6 | length 22.3
  Top Layer w0.508: C51.2 -39.048,-9.195 R33.1 -34.222,-9.711 -32.436,-7.925 -32.436,-6.655 L+.1 ; R30.2 -39.548,-4.369 -39.04,-4.877 -38.024,-4.877 -37.516,-4.369 R34.2 -37.262,-3.607 -36.648,-4.22 -34.87,-4.22 L+.1 ; U11.6 -34.595,-5.766 L+.1
NetC53_2: C53.2 U7.5 X1.3 | length 3.7
  Top Layer w0.203: C53.2 -56.972,-30.861 X1.3 ; X1.3@-56.004,-31.829 U7.5
NetC57_1: C57.1 U11.5 | length 5.7
  Top Layer w0.508: C57.1 -34.201,-8.171 -33.325,-7.295 U11.5
NetC57_2: C57.2 U11.8 | length 1.3
  Top Layer w0.508: C57.2 U11.8@-37.183,-7.163
NetC60_1: C60.1 R36.1 R38.2 U9.6 | length 6.7
  Top Layer w0.508: R36.1 -38.532,-0.813 -37.77,-0.051 R38.2
NetC60_2: C60.2 R35.2 R38.1 U9.7 | length 5.3
  Top Layer w0.508: U9.7 R38.1@-34.095,1.092 ; R38.1 R35.2
NetC62_1: C62.1 R39.2 R41.1 U13.3 | length 7.2
  Top Layer w0.508: C62.1 R39.2 -28.262,-0.195 -27.054,-0.195 U13.3 -25.959,-0.178 -24.308,-1.829 R41.1
NetC63_1: C63.1 R40.2 U8.18 U12.2 | length 13.9
  Top Layer w0.381: U8.18@-32.21,-18.222 -32.21,-16.589 -30.15,-14.529 -28.372,-14.529 -27.737,-13.894 U12.2
  Top Layer w0.508: C63.1 -30.912,-11.227 R40.2 -28.88,-10.719 -27.737,-11.862 U12.2
NetC63_2: C63.2 R40.1 R41.2 R49.2 R-.1 U12.6 | length 20.7
  Top Layer w0.508: C63.2 -30.92,-9.195 R40.1 -26.094,-9.711 -24.308,-7.925 -24.308,-6.655 R-.1 ; U12.6 -26.467,-5.766 R-.1 ; R41.2 R-.1 ; v2(-22.276,-4.115) R49.2
  Bottom Layer w0.508: R-.1 -24.816,-4.115 v2(-22.276,-4.115)
NetC65_1: C65.1 R17.2 U2.2 U8.26 | length 16.6
  Top Layer w0.381: U2.2 -43.993,-14.91 -43.104,-15.799 -38.532,-15.799 -37.41,-16.921 U8.26@-37.41,-18.222
  Top Layer w0.508: C65.1 -47.168,-11.227 R17.2 -45.136,-10.719 -43.993,-11.862 U2.2
NetC65_2: C65.2 L-.1 R17.1 R28.2 R36.2 U2.6 | length 21
  Top Layer w0.508: C65.2 -47.176,-9.195 R17.1 -42.35,-9.711 -40.564,-7.925 -40.564,-6.401 -41.834,-5.131 -42.723,-6.02 U2.6 ; L-.1 R28.2 ; v2(-38.532,-4.115) R36.2
  Bottom Layer w0.508: L-.1 -41.072,-4.115 v2(-38.532,-4.115)
NetC67_1: C67.1 U12.5 | length 5.6
  Top Layer w0.508: C67.1 -26.073,-8.171 U12.5@-25.197,-7.295
NetC67_2: C67.2 U12.8 | length 1.3
  Top Layer w0.508: C67.2 U12.8@-29.055,-7.163
NetC70_1: C70.1 R43.1 R44.2 U13.2 | length 9.4
  Top Layer w0.508: R44.2 -30.277,1.092 U13.2 -25.705,1.092 -23.292,-1.321 R43.1
NetC70_2: C70.2 R42.2 R44.1 U13.1 | length 5.1
  Top Layer w0.508: R44.1 U13.1@-27.189,2.227 ; U13.1@-27.114,2.422 R42.2
NetC72_1: C72.1 R45.2 R47.1 U13.5 | length 4.2
  Top Layer w0.508: R47.1 U13.5@-21.26,-1.654 ; U13.5 -19.795,-1.448 -19.414,-1.829 R45.2 C72.1
NetC73_1: C73.1 R46.2 U8.17 U14.2 | length 21.4
  Top Layer w0.381: U8.17@-31.56,-18.222 -31.56,-16.955 -29.896,-15.291 -20.498,-15.291 -19.609,-14.402 U14.2
  Top Layer w0.508: C73.1 -22.784,-11.227 R46.2 -20.752,-10.719 -19.609,-11.862 U14.2
NetC73_2: C73.2 R43.2 R46.1 R47.2 R+.1 U14.6 | length 21.9
  Top Layer w0.508: C73.2 -22.792,-9.195 R46.1 -17.966,-9.711 -16.18,-7.925 -16.18,-6.655 R+.1 ; R43.2 -23.292,-4.369 -22.784,-4.877 -21.768,-4.877 -21.26,-4.369 ; R47.2 -21.26,-4.369 ; U14.6 -18.339,-5.766 R+.1 ; -21.26,-4.369 -18.466,-4.369 R+.1
NetC75_1: C75.1 U14.5 | length 5.6
  Top Layer w0.508: C75.1 -17.945,-8.171 U14.5@-17.069,-7.295
NetC75_2: C75.2 U14.8 | length 1.3
  Top Layer w0.508: C75.2 U14.8@-20.927,-7.163
NetC76_1: C76.1 R49.1 R50.2 U13.6 | length 6.9
  Top Layer w0.508: R49.1 -22.276,-0.813 -21.514,-0.051 R50.2
NetC76_2: C76.2 R48.2 R50.1 U13.7 | length 5.7
  Top Layer w0.508: U13.7 -17.585,1.092 R50.1 R48.2
NetC78_1: C78.1 R5.2 U1.17 | length 3
  Top Layer w0.254: R5.2 -17.934,-42.113 -17.856,-42.113 C78.1@-17.468,-41.725 ; U1.17 -18.318,-40.835 -17.514,-41.639 C78.1
NetD1_1: D1.1 L50.2 U1.1 U1.24 | length 3.1
  Top Layer w0.381: L50.2@-13.848,-36.039 D1.1
NetD2_2: D2.2 L1.1 U1.13 U1.14 | length 1.3
  Top Layer w0.508: L1.1@-23.495,-41.656 -23.139,-41.3 -22.549,-41.3 D2.2
NetLED1_2: LED1.2 R25.1 | length 1.3
  Top Layer w0.254: LED1.2 R25.1
NetLED3_1: LED3.1 U7.36 | length 3.3
  Top Layer w0.152: U7.36 -41.184,-35.829 -40.564,-36.449 LED3.1
NetLED3_2: LED3.2 R6.1 | length 1.7
  Top Layer w0.381: LED3.2@-40.462,-39.167 R6.1
NetR11_1: R11.1@-38.278,-27.237 U8.1 | length 2.3
  Top Layer w0.254: U8.1 -38.718,-26.796 R11.1@-38.278,-27.237
NetR12_2: R12.2 U8.14 | length 2.9
  Top Layer w0.254: U8.14 -30.268,-26.577 -29.642,-27.203 R12.2
NetR13_2: R13.2 U8.4 | length 7.6
  Top Layer w0.254: R13.2 -37.113,-23.669 -36.768,-24.014 U8.4
NetR13_3: R13.3 U8.5 | length 8.6
  Top Layer w0.254: R13.3 -36.724,-23.169 -36.118,-23.775 U8.5
NetR13_4: R13.4 U8.6 | length 9.9
  Top Layer w0.254: R13.4 -35.853,-22.669 -35.468,-23.053 U8.6
NetR13_5: R13.5 U7.55 | length 7.6
  Top Layer w0.254: U7.55 -47.307,-24.244 -45.732,-22.669 R13.5
NetR13_6: R13.6 U7.57 | length 8.2
  Top Layer w0.254: U7.57 v2@-48.307,-24.532 ; v2(-46.685,-24.536) -45.318,-23.169 R13.6
  Bottom Layer w0.254: v2(-48.285,-24.511) -48.26,-24.536 v2(-46.685,-24.536)
NetR15_1: R15.1 U7.28 | length 2.1
  Top Layer w0.254: R15.1@-46.307,-41.179 U7.28
NetR18_2: R18.2 U8.2 | length 2.4
  Top Layer w0.254: U8.2 -38.068,-26.041 -37.389,-26.721 R18.2
NetR19_2: R19.2 U8.3 | length 2.2
  Top Layer w0.254: U8.3 -37.418,-26.006 -36.5,-26.924
NetR20_1: R20.1 U7.40 Y1.3 Y2.3 | length 17.2
  Top Layer w0.254: U7.40 v2(-40.949,-33.829) ; Y2.3 -33.868,-35.017 Y1.3
  Bottom Layer w0.254: v2(-40.949,-33.829) -39.551,-35.226 -35.056,-35.226 v2(-35.052,-35.23) v2(-35.052,-28.448)
NetR20_2: R20.2 U8.7 | length 2.2
  Top Layer w0.254: R20.2 -34.818,-26.944 U8.7
NetR21_1: R21.1 SW3.2 | length 5.3
  Top Layer w0.381: SW3.2 -57.375,-42.037 -54.221,-42.037 R21.1
NetR22_1: R22.1 U8.10 | length 2.6
  Top Layer w0.254: U8.10 -32.868,-26.314 -32.487,-26.695 R22.1@-32.487,-27.567
NetR23_1: R23.1 U8.11 | length 2.9
  Top Layer w0.254: U8.11 -32.218,-26.303 -31.725,-26.797 -31.725,-27.44 R23.1
NetR24_1: R24.1 U8.12 | length 3
  Top Layer w0.254: U8.12 -31.568,-26.344 -31.293,-26.619 -31.293,-26.918 -30.531,-27.68 R24.1
NetR25_2: R25.2 U8.13 | length 4.3
  Top Layer w0.254: U8.13 -30.918,-24.111 -30.607,-23.8 -29.261,-23.8 R25.2
NetR26_2: R26.2 U8.20 | length 2.8
  Top Layer w0.381: R26.2 -33.51,-16.745 U8.20@-33.51,-18.222
NetU7_2: U7.2
NetU7_3: U7.3
NetU7_56: U7.56
OL+: *.5 *.6 OL+.1 R35.1 | length 41
  Top Layer w0.508: *.6 -51.74,-7.309 -51.74,-4.088 -51.214,-3.562 -50.425,-3.562 -49.225,-2.362 -49.225,4.496 -48.184,5.537 -39.802,5.537 OL+.1 -37.77,5.537 -34.988,5.537 R35.1
  Bottom Layer w0.762: *.5 *.6
OL-: *.4 OL-.1 R29.1 | length 20.9
  Top Layer w0.508: *.4@-50.88,-4.869 -49.7,-4.869 -48.438,-3.607 -48.438,3.505 OL-.1 -47.422,4.521 R29.1
  Bottom Layer w0.762: *.4@-57.68,-4.869 *.4@-50.88,-4.869
OR+: *.3 OR+.1 R48.1 | length 43.6
  Top Layer w0.508: OR+.1 -21.768,5.283 -18.224,5.283 R48.1
  Bottom Layer w0.508: *.3@-50.88,-2.169 -49.524,-0.813 -33.452,-0.813 -28.118,4.521 OR+.1
  Bottom Layer w0.762: *.3@-57.68,-2.169 *.3@-50.88,-2.169
OR-: *.2 OR-.1 R42.1 | length 30.7
  Top Layer w0.508: OR-.1 -28.868,4.521 R42.1
  Bottom Layer w0.508: *.2@-50.88,0.531 -35.156,0.531 OR-.1@-31.42,4.267
  Bottom Layer w0.762: *.2@-57.68,0.531 *.2@-50.88,0.531
PA9: U7.42
PA10: U7.43
PA11: U7.44 USB2.2 | length 16.6
  Top Layer w0.203: U7.44 -42.503,-31.833 -40.645,-31.833 -40.641,-31.829 -40.434,-31.829 -39.802,-32.461 -39.802,-35.865 -38.405,-37.262 -36.881,-37.262 -34.468,-39.675 -32.563,-39.675 -32.324,-39.436 USB2.2
PA12: U7.45 USB2.3 | length 18
  Top Layer w0.203: U7.45 v2(-40.854,-31.329) ; v2(-40.854,-32.527) -40.183,-33.198 -40.183,-35.992 -38.532,-37.643 -37.003,-37.643 -34.615,-40.03 -32.41,-40.03 -31.674,-39.294 USB2.3
  Bottom Layer w0.203: v2(-40.854,-32.527) v2(-40.854,-31.329)
PA13: P2.3 U7.46 | length 17.8
  Top Layer w0.152: P2.3 -49.505,-24.435 v2(-49.022,-24.917) ; v2(-43.688,-25.451) -43.84,-25.603 -43.84,-30.607 -43.619,-30.829 U7.46
  Bottom Layer w0.152: v2(-49.022,-24.917) -48.489,-25.451 v2(-43.688,-25.451)
PA14: P2.2 U7.49 | length 13.9
  Top Layer w0.152: P2.2 v2(-48.372,-23.785) ; U7.49 -44.307,-24.952 v2(-44.196,-24.841)
  Bottom Layer w0.152: v2(-48.372,-23.785) -45.252,-23.785 v2(-44.196,-24.841)
PA15: R13.7 U7.50 | length 4.8
  Top Layer w0.254: U7.50 -44.807,-24.079 -44.397,-23.669 R13.7
pads on no net: P2.4 R13.1 R13.8 SW3.3 SW3.4 U1.7 U1.12 U1.20 U2.1 U3.3 U3.7 U4.3 U4.7 U5.4 U6.3 U6.7 U7.4 U7.7 U7.8 U7.9 U7.10 U7.11 U7.14 U7.15 U7.16 U7.17 U7.20 U7.21 U7.22 U7.23 U7.24 U7.25 U7.26 U7.27 U7.29 U7.33 U7.34 U7.35 U7.37 U7.38 U7.39 U7.41 U7.51 U7.52 U7.53 U7.54 U7.58 U7.59 U7.62 U10.4 U11.1 U12.1 U14.1 USB2.4 Y1.1 Y2.1
copper on no net: | length 118
  Top Layer w0.508: 0,-27 9.3,-27 9.3,-29.5 14.2,-29.5 14.2,-27 23.5,-27 23.5,0 21.7,0 21.7,3 16.7,3 16.7,0 6.7,0 6.7,3 1.7,3 1.7,0 0,0 0,-27

## Polygon pours and split planes (outlines as drawn)
-7V on Bottom Layer "-7V_L04_P000" (solid, remove dead copper, pour order 0): -46.66,-6.147 -14.656,-6.147 -14.656,-18.847 -17.958,-18.847 -17.958,-14.783 -46.66,-14.783
GND on GND (split plane): -53.064,-22.203 -53.011,-22.244 -52.967,-22.262 -52.949,-22.269 -52.883,-22.278 -25.961,-22.278 -25.961,-29.769 -25.961,-32.309 -25.961,-35.378 -26.954,-36.371 -38.299,-36.371 -39.038,-35.632 -39.038,-24.562 -39.046,-24.495 -39.059,-24.465 -39.072,-24.434 -39.113,-24.381 -40.383,-23.111 -40.436,-23.07 -40.497,-23.044 -40.564,-23.036 -40.63,-23.044 -40.692,-23.07 -40.745,-23.111 -40.786,-23.164 -40.811,-23.225 -40.82,-23.292 -40.811,-23.358 -40.786,-23.42 -40.745,-23.473 -39.55,-24.668 -39.55,-35.738 -39.541,-35.804 -39.516,-35.866 -39.475,-35.919 -38.586,-36.808 -38.533,-36.849 -38.471,-36.874 -38.405,-36.883 -26.848,-36.883 -26.781,-36.874 -26.72,-36.849 -26.667,-36.808 -25.524,-35.665 -25.483,-35.612 -25.457,-35.55 -25.449,-35.484 -25.449,-32.565 -10.378,-32.565 -10.378,-43.228 -59.357,-43.228 -59.357,-15.91
AGND on GND (split plane): -10.378,-32.053 -25.449,-32.053 -25.449,-22.022 -25.457,-21.955 -25.483,-21.894 -25.524,-21.841 -25.577,-21.8 -25.638,-21.774 -25.705,-21.766 -52.777,-21.766 -59.357,-15.185 -59.357,5.751 -10.378,5.751
AGND on PWR (split plane): -10.378,-32.053 -25.576,-32.053 -25.576,-19.357 -10.378,-19.357
GND on PWR (split plane): -26.088,-32.309 -26.079,-32.375 -26.054,-32.437 -26.013,-32.49 -25.96,-32.531 -25.898,-32.556 -25.832,-32.565 -10.378,-32.565 -10.378,-43.228 -39.444,-43.228 -39.444,-19.357 -26.088,-19.357
7V on PWR (split plane): -10.378,-18.845 -59.357,-18.845 -59.357,5.751 -10.378,5.751
3.3D on PWR (split plane): -39.956,-43.228 -59.357,-43.228 -59.357,-19.357 -39.956,-19.357

## Keep-outs
Keep-Out Layer:
  the board outline again, w0.305

## Other copper
Top Layer:
  rectangle net NetD2_2: -22.403,-41.148 -19.685,-40.691
  rectangle net NetD1_1: -17.704,-37.084 -16.485,-35.509
  rectangle net Net*_1: -58.344,2.235 -50.216,4.521
  rectangle net Net*_1: -56.058,-14.021 -52.502,4.267
GND (plane layer: these items are gaps in the copper):
  lines w0.508: -59.868,-12.239 -59.868,-15.037 -52.883,-22.022 -25.705,-22.022 -25.705,-32.309 -9.906,-32.309 ; -40.564,-23.292 -39.294,-24.562 -39.294,-35.738 -38.405,-36.627 -26.848,-36.627 -25.705,-35.484 -25.705,-29.769
PWR (plane layer: these items are gaps in the copper):
  lines w0.508: -59.868,-19.101 -9.868,-19.101 ; -40.056,-19.101 -39.7,-19.101 -39.7,-43.917 ; -25.832,-19.101 -25.832,-32.309 -9.868,-32.309

## Text inside footprints (layer, text, board x,y; h text height)
R13: Mechanical 1 "R1" at -43.792,-23.22 h0.3 r270